# EAGLE board FTDI Basic-GiantPanel-v24-3.3V (EAGLE 6.4), part 1 of 8
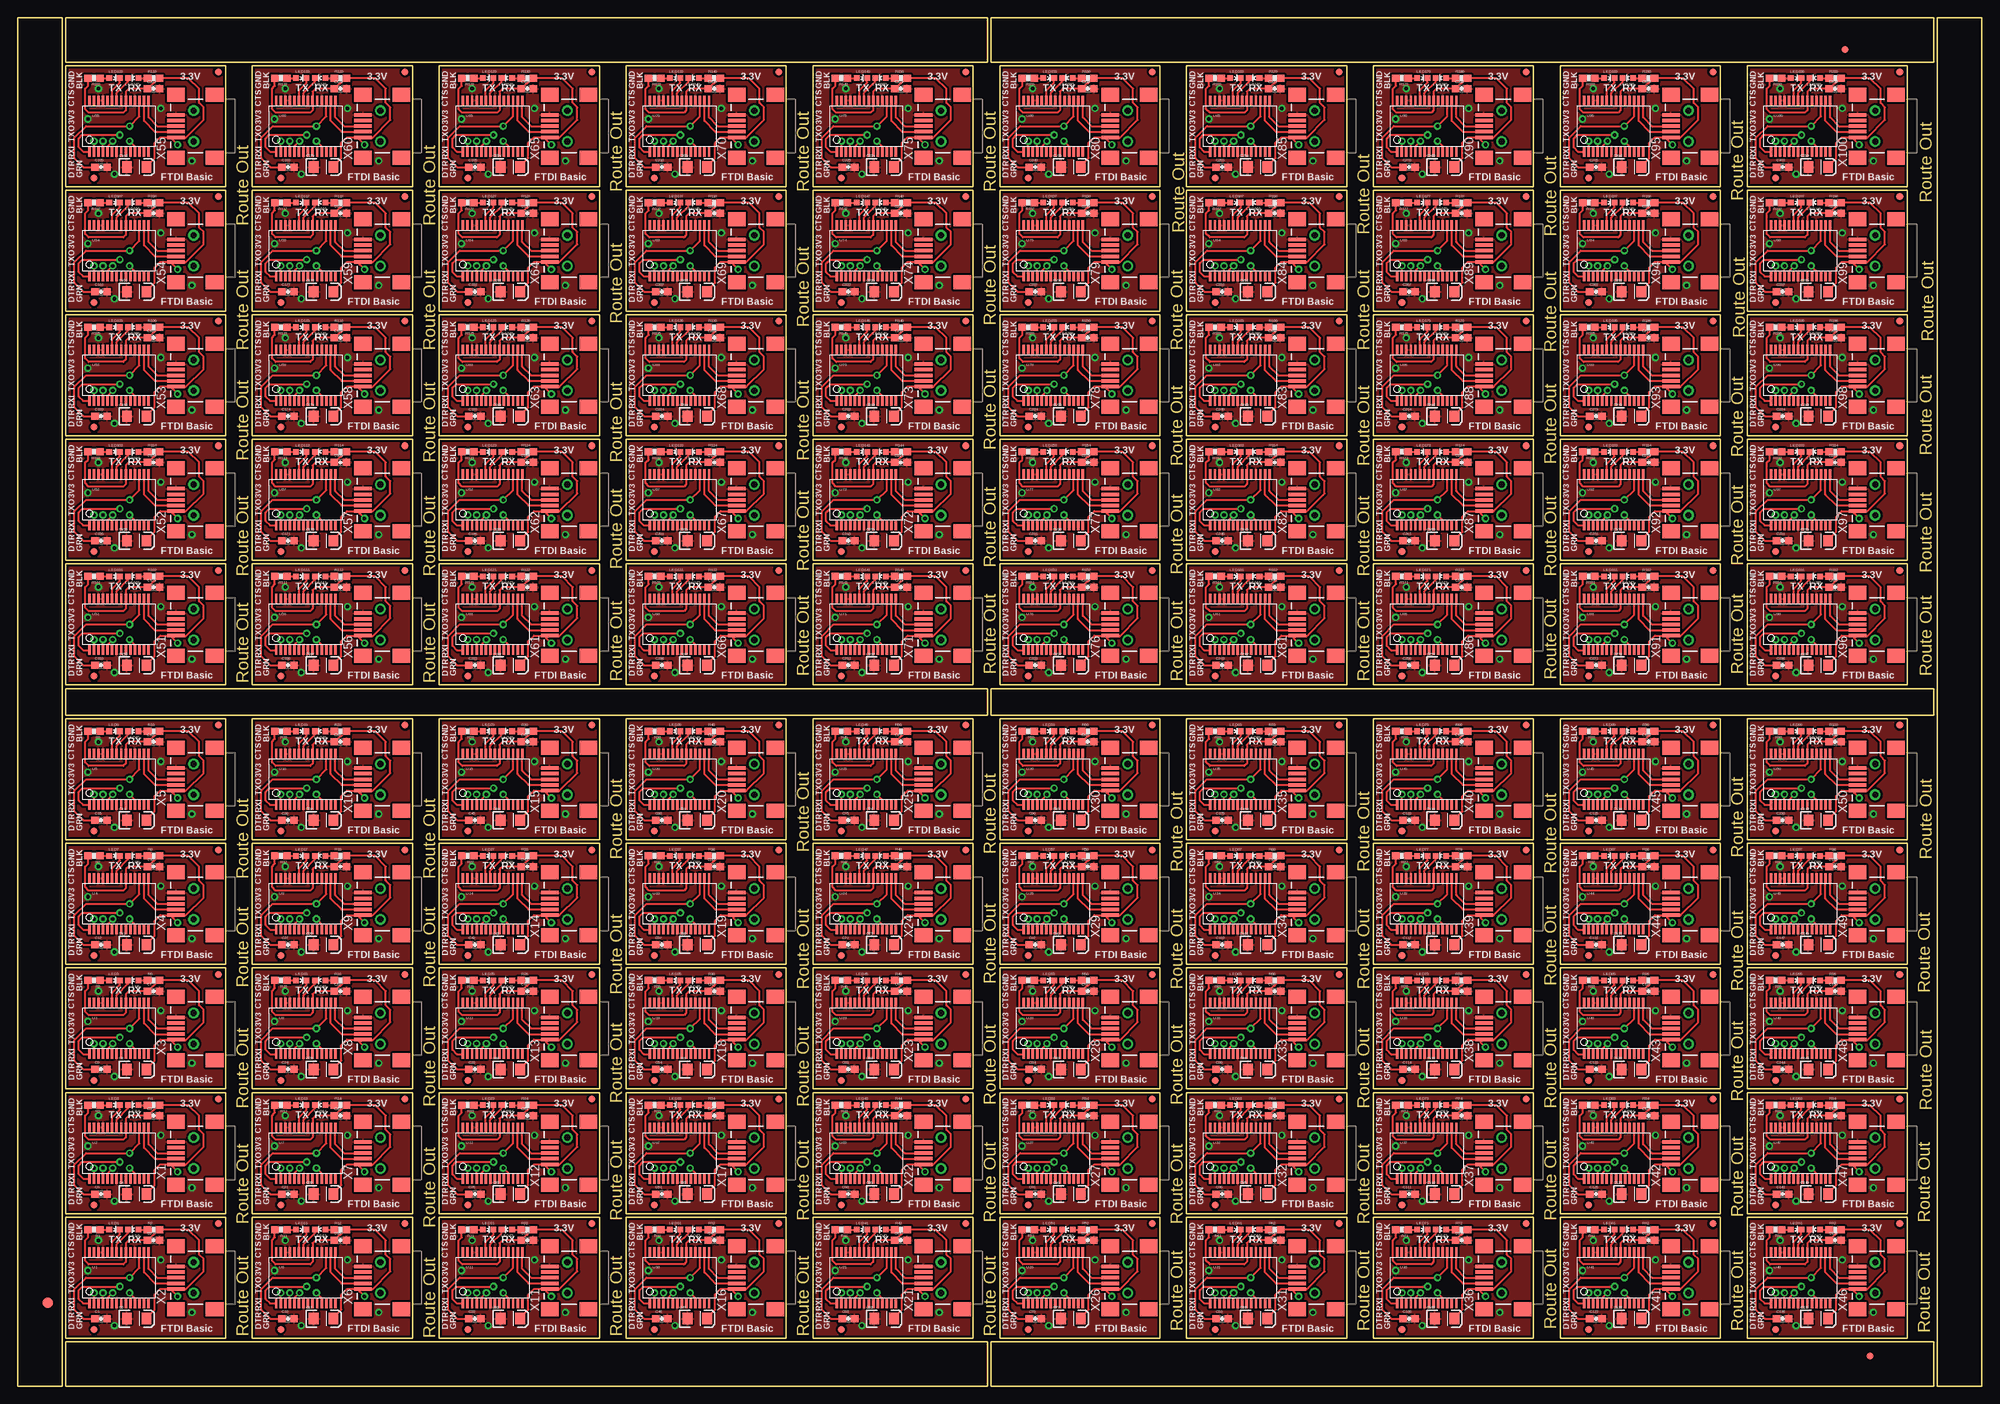
[diagram p0: board, top side]
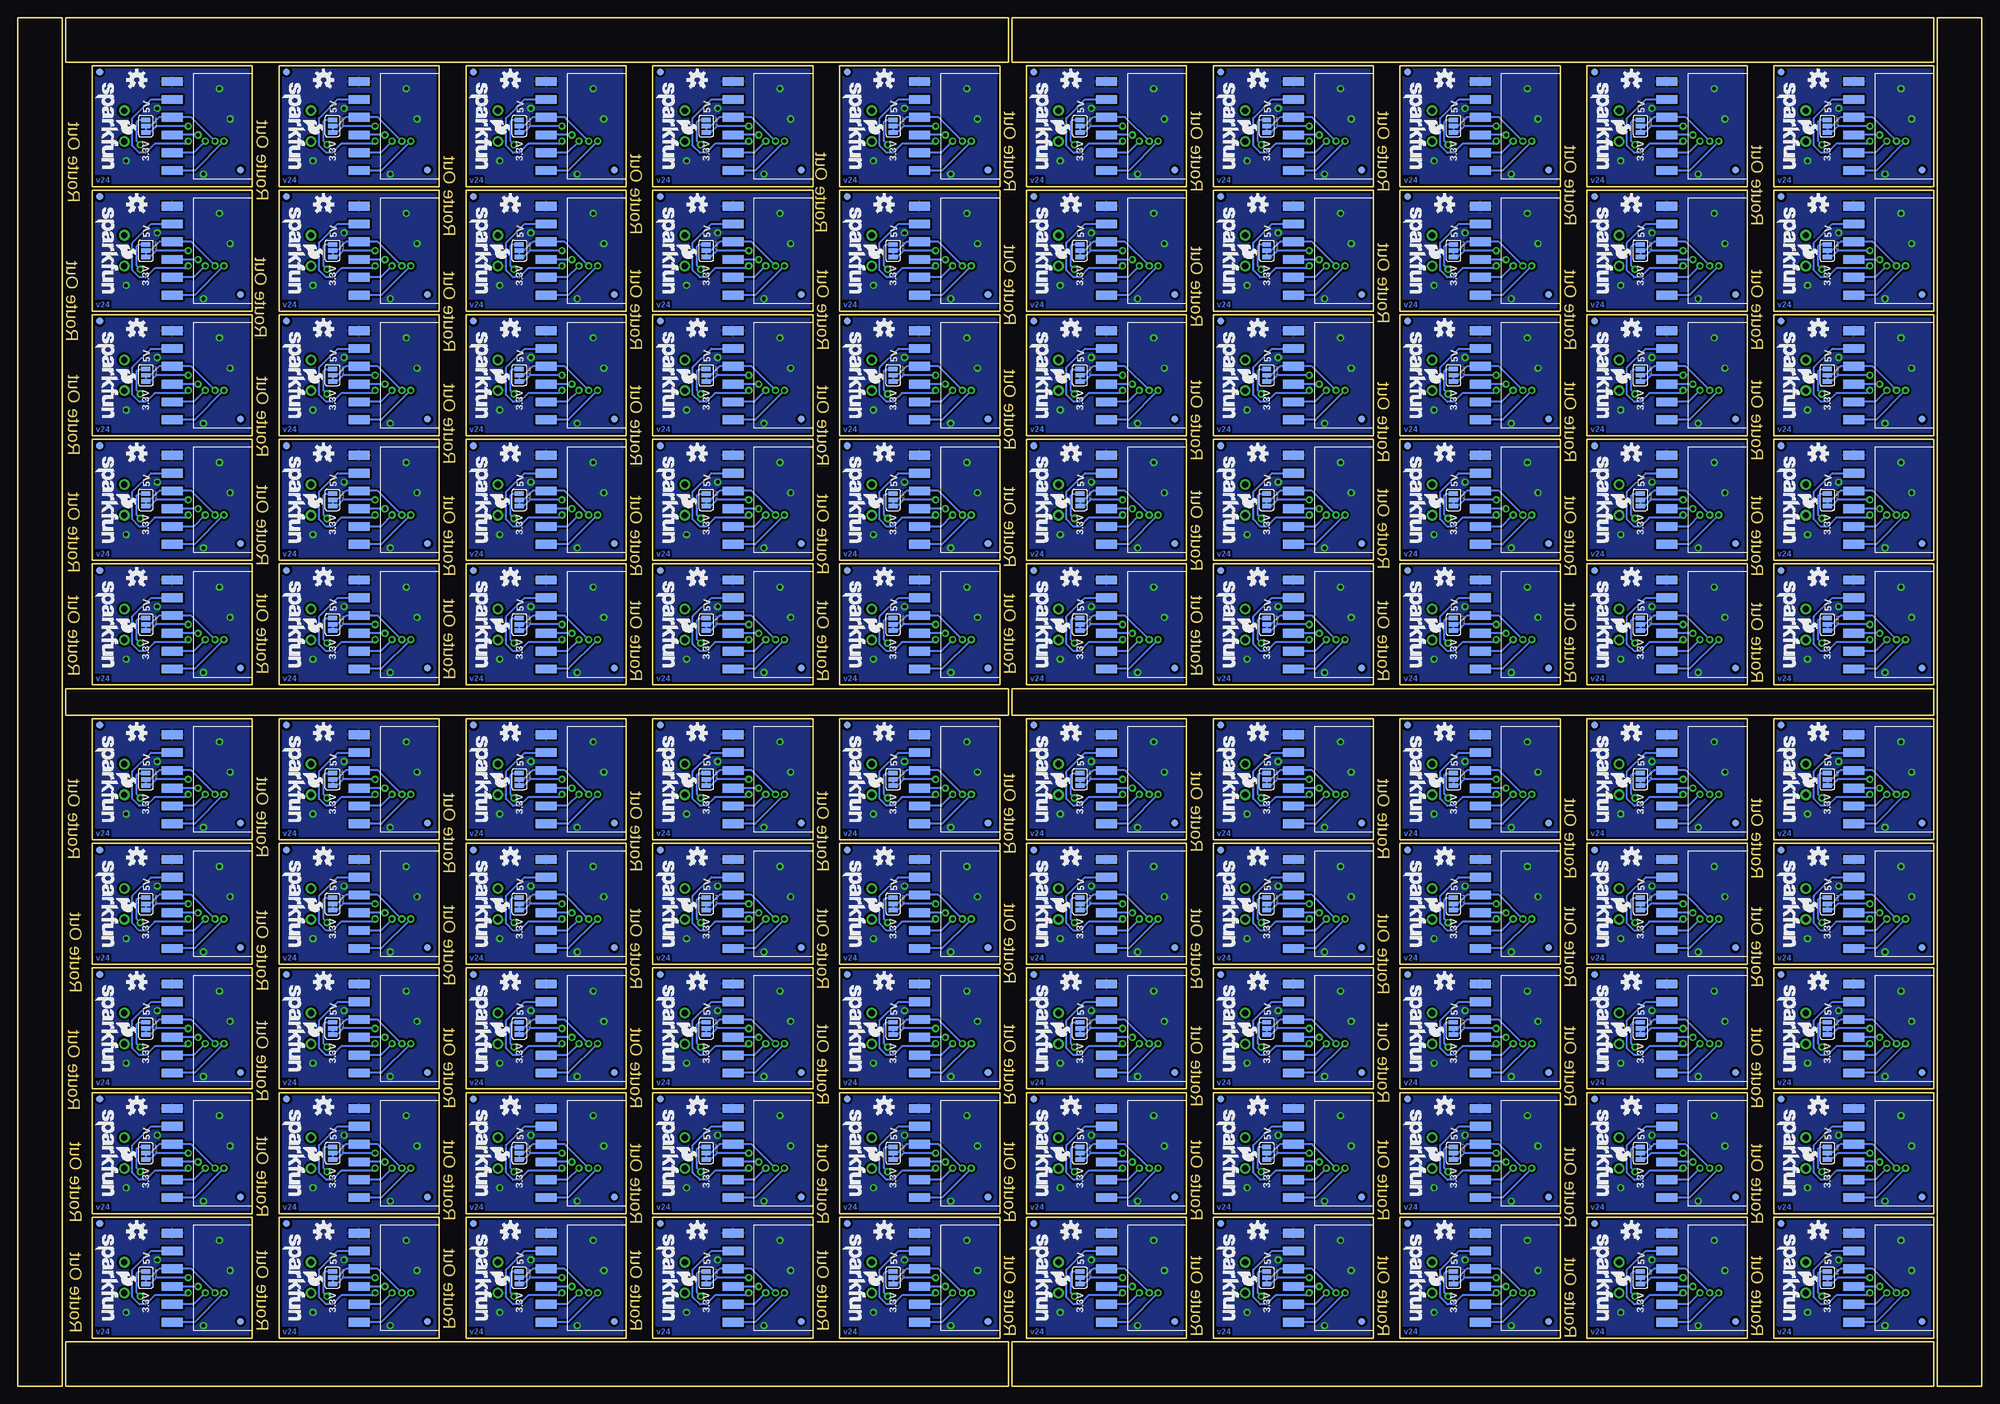
[diagram p1: board, bottom side, seen from below]

Size 280.42 x 195.33 mm. Coordinates in mm from the lower left corner, seen from the top.
Outline: 432 segments
Copper layers (1*16): Top 0.035mm / dielectric 1.5mm / Bottom 0.035mm
Design rules "SparkFun": minimum track width 8mil, minimum drill 20mil, track to track 8mil, track to pad 8mil, pad to pad 8mil, via to via 8mil, smd to smd 8mil, copper to edge 8mil, drill to drill 8mil, minimum pad ring 12mil, minimum via ring 10mil, stop-mask expansion 4mil, vias tented up to drill 20mil, thermal gap 10mil
Net classes: 0 default: width 0.203 mm; 1 power: width 0.254 mm

## Footprints (pad centres in the part's own frame; a part is rotated, then mirrored left to right if it is on the bottom)
0603-CAP = smd 1.1 x 1: 1 -0.85,0; 2 0.85,0
EIA3216 = smd 1.4 x 1.6: A 1.4,0; C -1.4,0
FIDUCIAL-1.5X3 = smd 1.5 x 1.5: 1 0,0
FIDUCIAL-1X2 = smd 1 x 1: 1 0,0
1X06-SMD-FEMALE-V2 = smd 1.25 x 3: 1 6.35,3.425; 2 3.81,3.425; 3 1.27,3.425; 4 -1.27,3.425; 5 -3.81,3.425; 6 -6.35,3.425
LED-0603 = smd 0.8 x 0.8: A 0,-0.75; C 0,0.75
0603-RES = smd 1.1 x 1: 1 -0.85,0; 2 0.85,0
SJ_3 = smd 0.635 x 1.27: 1 -0.889,0; 2 0,0; 3 0.889,0
SSOP28DB = smd 0.348 x 1.397: 1 -4.225,-3.656; 2 -3.575,-3.656; 3 -2.925,-3.656; 4 -2.275,-3.656; 5 -1.625,-3.656; 6 -0.975,-3.656; 7 -0.325,-3.656; 8 0.325,-3.656; 9 0.975,-3.656; 10 1.625,-3.656; 11 2.275,-3.656; 12 2.925,-3.656; 13 3.575,-3.656; 14 4.225,-3.656; 15 4.225,3.656; 16 3.575,3.656; 17 2.925,3.656; 18 2.275,3.656; 19 1.625,3.656; 20 0.975,3.656; 21 0.325,3.656; 22 -0.325,3.656; 23 -0.975,3.656; 24 -1.625,3.656; 25 -2.275,3.656; 26 -2.925,3.656; 27 -3.575,3.656; 28 -4.225,3.656
USB-MINIB-NOSTOP = smd 2.5 x 0.5: D+ 2.5,0; D- 2.5,0.8; GND 2.5,-1.6; ID 2.5,-0.8; VBUS 2.5,1.6 | smd 2.5 x 2: G1 -3,-4.5; G2 -3,4.5; G3 2.5,4.5; G4 2.5,-4.5 | drill 0.9 pad 0.8: H1 0,2.2 | drill 0.9 pad 0.787: H2 0,-2.2

## Placement (x,y rotation side)
C1  0.1uF  [0603-CAP]  11.94,9.65 0 top
C2  0.1uF  [0603-CAP]  19.43,20.83 0 top
C3  0.1uF  [0603-CAP]  19.43,38.61 0 top
C4  10uF  [EIA3216]  17.02,27.43 0 top
C5  10uF  [EIA3216]  17.02,9.65 0 top
C6  0.1uF  [0603-CAP]  11.94,27.43 0 top
C7  0.1uF  [0603-CAP]  19.43,56.39 0 top
C8  10uF  [EIA3216]  17.02,45.21 0 top
C9  0.1uF  [0603-CAP]  11.94,45.21 0 top
C10  0.1uF  [0603-CAP]  19.43,74.17 0 top
C11  10uF  [EIA3216]  17.02,62.99 0 top
C12  0.1uF  [0603-CAP]  11.94,62.99 0 top
C13  0.1uF  [0603-CAP]  19.43,91.95 0 top
C14  10uF  [EIA3216]  17.02,80.77 0 top
C15  0.1uF  [0603-CAP]  11.94,80.77 0 top
C16  0.1uF  [0603-CAP]  46.1,20.83 0 top
C17  10uF  [EIA3216]  43.69,9.65 0 top
C18  0.1uF  [0603-CAP]  38.61,9.65 0 top
C19  0.1uF  [0603-CAP]  46.1,38.61 0 top
C20  10uF  [EIA3216]  43.69,27.43 0 top
C21  0.1uF  [0603-CAP]  38.61,27.43 0 top
C22  0.1uF  [0603-CAP]  46.1,56.39 0 top
C23  10uF  [EIA3216]  43.69,45.21 0 top
C24  0.1uF  [0603-CAP]  38.61,45.21 0 top
C25  0.1uF  [0603-CAP]  46.1,74.17 0 top
C26  10uF  [EIA3216]  43.69,62.99 0 top
C27  0.1uF  [0603-CAP]  38.61,62.99 0 top
C28  0.1uF  [0603-CAP]  46.1,91.95 0 top
C29  10uF  [EIA3216]  43.69,80.77 0 top
C30  0.1uF  [0603-CAP]  38.61,80.77 0 top
C31  0.1uF  [0603-CAP]  72.77,20.83 0 top
C32  10uF  [EIA3216]  70.36,9.65 0 top
C33  0.1uF  [0603-CAP]  65.28,9.65 0 top
C34  0.1uF  [0603-CAP]  72.77,38.61 0 top
C35  10uF  [EIA3216]  70.36,27.43 0 top
C36  0.1uF  [0603-CAP]  65.28,27.43 0 top
C37  0.1uF  [0603-CAP]  72.77,56.39 0 top
C38  10uF  [EIA3216]  70.36,45.21 0 top
C39  0.1uF  [0603-CAP]  65.28,45.21 0 top
C40  0.1uF  [0603-CAP]  72.77,74.17 0 top
C41  10uF  [EIA3216]  70.36,62.99 0 top
C42  0.1uF  [0603-CAP]  65.28,62.99 0 top
C43  0.1uF  [0603-CAP]  72.77,91.95 0 top
C44  10uF  [EIA3216]  70.36,80.77 0 top
C45  0.1uF  [0603-CAP]  65.28,80.77 0 top
C46  0.1uF  [0603-CAP]  99.44,20.83 0 top
C47  10uF  [EIA3216]  97.03,9.65 0 top
C48  0.1uF  [0603-CAP]  91.95,9.65 0 top
C49  0.1uF  [0603-CAP]  99.44,38.61 0 top
C50  10uF  [EIA3216]  97.03,27.43 0 top
C51  0.1uF  [0603-CAP]  91.95,27.43 0 top
C52  0.1uF  [0603-CAP]  99.44,56.39 0 top
C53  10uF  [EIA3216]  97.03,45.21 0 top
C54  0.1uF  [0603-CAP]  91.95,45.21 0 top
C55  0.1uF  [0603-CAP]  99.44,74.17 0 top
C56  10uF  [EIA3216]  97.03,62.99 0 top
C57  0.1uF  [0603-CAP]  91.95,62.99 0 top
C58  0.1uF  [0603-CAP]  99.44,91.95 0 top
C59  10uF  [EIA3216]  97.03,80.77 0 top
C60  0.1uF  [0603-CAP]  91.95,80.77 0 top
C61  0.1uF  [0603-CAP]  126.11,20.83 0 top
C62  10uF  [EIA3216]  123.7,9.65 0 top
C63  0.1uF  [0603-CAP]  118.62,9.65 0 top
C64  0.1uF  [0603-CAP]  126.11,38.61 0 top
C65  10uF  [EIA3216]  123.7,27.43 0 top
C66  0.1uF  [0603-CAP]  118.62,27.43 0 top
C67  0.1uF  [0603-CAP]  126.11,56.39 0 top
C68  10uF  [EIA3216]  123.7,45.21 0 top
C69  0.1uF  [0603-CAP]  118.62,45.21 0 top
C70  0.1uF  [0603-CAP]  126.11,74.17 0 top
C71  10uF  [EIA3216]  123.7,62.99 0 top
C72  0.1uF  [0603-CAP]  118.62,62.99 0 top
C73  0.1uF  [0603-CAP]  126.11,91.95 0 top
C74  10uF  [EIA3216]  123.7,80.77 0 top
C75  0.1uF  [0603-CAP]  118.62,80.77 0 top
C76  0.1uF  [0603-CAP]  152.78,20.83 0 top
C77  10uF  [EIA3216]  150.37,9.65 0 top
C78  0.1uF  [0603-CAP]  145.29,9.65 0 top
C79  0.1uF  [0603-CAP]  152.78,38.61 0 top
C80  10uF  [EIA3216]  150.37,27.43 0 top
C81  0.1uF  [0603-CAP]  145.29,27.43 0 top
C82  0.1uF  [0603-CAP]  152.78,56.39 0 top
C83  10uF  [EIA3216]  150.37,45.21 0 top
C84  0.1uF  [0603-CAP]  145.29,45.21 0 top
C85  0.1uF  [0603-CAP]  152.78,74.17 0 top
C86  10uF  [EIA3216]  150.37,62.99 0 top
C87  0.1uF  [0603-CAP]  145.29,62.99 0 top
C88  0.1uF  [0603-CAP]  152.78,91.95 0 top
C89  10uF  [EIA3216]  150.37,80.77 0 top
C90  0.1uF  [0603-CAP]  145.29,80.77 0 top
C91  0.1uF  [0603-CAP]  179.45,20.83 0 top
C92  10uF  [EIA3216]  177.04,9.65 0 top
C93  0.1uF  [0603-CAP]  171.96,9.65 0 top
C94  0.1uF  [0603-CAP]  179.45,38.61 0 top
C95  10uF  [EIA3216]  177.04,27.43 0 top
C96  0.1uF  [0603-CAP]  171.96,27.43 0 top
C97  0.1uF  [0603-CAP]  179.45,56.39 0 top
C98  10uF  [EIA3216]  177.04,45.21 0 top
C99  0.1uF  [0603-CAP]  171.96,45.21 0 top
C100  0.1uF  [0603-CAP]  179.45,74.17 0 top
C101  10uF  [EIA3216]  177.04,62.99 0 top
C102  0.1uF  [0603-CAP]  171.96,62.99 0 top
C103  0.1uF  [0603-CAP]  179.45,91.95 0 top
C104  10uF  [EIA3216]  177.04,80.77 0 top
C105  0.1uF  [0603-CAP]  171.96,80.77 0 top
C106  0.1uF  [0603-CAP]  206.12,20.83 0 top
C107  10uF  [EIA3216]  203.71,9.65 0 top
C108  0.1uF  [0603-CAP]  198.63,9.65 0 top
C109  0.1uF  [0603-CAP]  206.12,38.61 0 top
C110  10uF  [EIA3216]  203.71,27.43 0 top
C111  0.1uF  [0603-CAP]  198.63,27.43 0 top
C112  0.1uF  [0603-CAP]  206.12,56.39 0 top
C113  10uF  [EIA3216]  203.71,45.21 0 top
C114  0.1uF  [0603-CAP]  198.63,45.21 0 top
C115  0.1uF  [0603-CAP]  206.12,74.17 0 top
C116  10uF  [EIA3216]  203.71,62.99 0 top
C117  0.1uF  [0603-CAP]  198.63,62.99 0 top
C118  0.1uF  [0603-CAP]  206.12,91.95 0 top
C119  10uF  [EIA3216]  203.71,80.77 0 top
C120  0.1uF  [0603-CAP]  198.63,80.77 0 top
C121  0.1uF  [0603-CAP]  232.79,20.83 0 top
C122  10uF  [EIA3216]  230.38,9.65 0 top
C123  0.1uF  [0603-CAP]  225.3,9.65 0 top
C124  0.1uF  [0603-CAP]  232.79,38.61 0 top
C125  10uF  [EIA3216]  230.38,27.43 0 top
C126  0.1uF  [0603-CAP]  225.3,27.43 0 top
C127  0.1uF  [0603-CAP]  232.79,56.39 0 top
C128  10uF  [EIA3216]  230.38,45.21 0 top
C129  0.1uF  [0603-CAP]  225.3,45.21 0 top
C130  0.1uF  [0603-CAP]  232.79,74.17 0 top
C131  10uF  [EIA3216]  230.38,62.99 0 top
C132  0.1uF  [0603-CAP]  225.3,62.99 0 top
C133  0.1uF  [0603-CAP]  232.79,91.95 0 top
C134  10uF  [EIA3216]  230.38,80.77 0 top
C135  0.1uF  [0603-CAP]  225.3,80.77 0 top
C136  0.1uF  [0603-CAP]  259.46,20.83 0 top
C137  10uF  [EIA3216]  257.05,9.65 0 top
C138  0.1uF  [0603-CAP]  251.97,9.65 0 top
C139  0.1uF  [0603-CAP]  259.46,38.61 0 top
C140  10uF  [EIA3216]  257.05,27.43 0 top
C141  0.1uF  [0603-CAP]  251.97,27.43 0 top
C142  0.1uF  [0603-CAP]  259.46,56.39 0 top
C143  10uF  [EIA3216]  257.05,45.21 0 top
C144  0.1uF  [0603-CAP]  251.97,45.21 0 top
C145  0.1uF  [0603-CAP]  259.46,74.17 0 top
C146  10uF  [EIA3216]  257.05,62.99 0 top
C147  0.1uF  [0603-CAP]  251.97,62.99 0 top
C148  0.1uF  [0603-CAP]  259.46,91.95 0 top
C149  10uF  [EIA3216]  257.05,80.77 0 top
C150  0.1uF  [0603-CAP]  251.97,80.77 0 top
C151  0.1uF  [0603-CAP]  19.43,114.05 0 top
C152  10uF  [EIA3216]  17.02,102.87 0 top
C153  0.1uF  [0603-CAP]  11.94,102.87 0 top
C154  0.1uF  [0603-CAP]  19.43,131.83 0 top
C155  10uF  [EIA3216]  17.02,120.65 0 top
C156  0.1uF  [0603-CAP]  11.94,120.65 0 top
C157  0.1uF  [0603-CAP]  19.43,149.61 0 top
C158  10uF  [EIA3216]  17.02,138.43 0 top
C159  0.1uF  [0603-CAP]  11.94,138.43 0 top
C160  0.1uF  [0603-CAP]  19.43,167.39 0 top
C161  10uF  [EIA3216]  17.02,156.21 0 top
C162  0.1uF  [0603-CAP]  11.94,156.21 0 top
C163  0.1uF  [0603-CAP]  19.43,185.17 0 top
C164  10uF  [EIA3216]  17.02,173.99 0 top
C165  0.1uF  [0603-CAP]  11.94,173.99 0 top
C166  0.1uF  [0603-CAP]  46.1,114.05 0 top
C167  10uF  [EIA3216]  43.69,102.87 0 top
C168  0.1uF  [0603-CAP]  38.61,102.87 0 top
C169  0.1uF  [0603-CAP]  46.1,131.83 0 top
C170  10uF  [EIA3216]  43.69,120.65 0 top
C171  0.1uF  [0603-CAP]  38.61,120.65 0 top
C172  0.1uF  [0603-CAP]  46.1,149.61 0 top
C173  10uF  [EIA3216]  43.69,138.43 0 top
C174  0.1uF  [0603-CAP]  38.61,138.43 0 top
C175  0.1uF  [0603-CAP]  46.1,167.39 0 top
C176  10uF  [EIA3216]  43.69,156.21 0 top
C177  0.1uF  [0603-CAP]  38.61,156.21 0 top
C178  0.1uF  [0603-CAP]  46.1,185.17 0 top
C179  10uF  [EIA3216]  43.69,173.99 0 top
C180  0.1uF  [0603-CAP]  38.61,173.99 0 top
C181  0.1uF  [0603-CAP]  72.77,114.05 0 top
C182  10uF  [EIA3216]  70.36,102.87 0 top
C183  0.1uF  [0603-CAP]  65.28,102.87 0 top
C184  0.1uF  [0603-CAP]  72.77,131.83 0 top
C185  10uF  [EIA3216]  70.36,120.65 0 top
C186  0.1uF  [0603-CAP]  65.28,120.65 0 top
C187  0.1uF  [0603-CAP]  72.77,149.61 0 top
C188  10uF  [EIA3216]  70.36,138.43 0 top
C189  0.1uF  [0603-CAP]  65.28,138.43 0 top
C190  0.1uF  [0603-CAP]  72.77,167.39 0 top
C191  10uF  [EIA3216]  70.36,156.21 0 top
C192  0.1uF  [0603-CAP]  65.28,156.21 0 top
C193  0.1uF  [0603-CAP]  72.77,185.17 0 top
C194  10uF  [EIA3216]  70.36,173.99 0 top
C195  0.1uF  [0603-CAP]  65.28,173.99 0 top
C196  0.1uF  [0603-CAP]  99.44,114.05 0 top
C197  10uF  [EIA3216]  97.03,102.87 0 top
C198  0.1uF  [0603-CAP]  91.95,102.87 0 top
C199  0.1uF  [0603-CAP]  99.44,131.83 0 top
C200  10uF  [EIA3216]  97.03,120.65 0 top
C201  0.1uF  [0603-CAP]  91.95,120.65 0 top
C202  0.1uF  [0603-CAP]  99.44,149.61 0 top
C203  10uF  [EIA3216]  97.03,138.43 0 top
C204  0.1uF  [0603-CAP]  91.95,138.43 0 top
C205  0.1uF  [0603-CAP]  99.44,167.39 0 top
C206  10uF  [EIA3216]  97.03,156.21 0 top
C207  0.1uF  [0603-CAP]  91.95,156.21 0 top
C208  0.1uF  [0603-CAP]  99.44,185.17 0 top
C209  10uF  [EIA3216]  97.03,173.99 0 top
C210  0.1uF  [0603-CAP]  91.95,173.99 0 top
C211  0.1uF  [0603-CAP]  126.11,114.05 0 top
C212  10uF  [EIA3216]  123.7,102.87 0 top
C213  0.1uF  [0603-CAP]  118.62,102.87 0 top
C214  0.1uF  [0603-CAP]  126.11,131.83 0 top
C215  10uF  [EIA3216]  123.7,120.65 0 top
C216  0.1uF  [0603-CAP]  118.62,120.65 0 top
C217  0.1uF  [0603-CAP]  126.11,149.61 0 top
C218  10uF  [EIA3216]  123.7,138.43 0 top
C219  0.1uF  [0603-CAP]  118.62,138.43 0 top
C220  0.1uF  [0603-CAP]  126.11,167.39 0 top
C221  10uF  [EIA3216]  123.7,156.21 0 top
C222  0.1uF  [0603-CAP]  118.62,156.21 0 top
C223  0.1uF  [0603-CAP]  126.11,185.17 0 top
C224  10uF  [EIA3216]  123.7,173.99 0 top
C225  0.1uF  [0603-CAP]  118.62,173.99 0 top
C226  0.1uF  [0603-CAP]  152.78,114.05 0 top
C227  10uF  [EIA3216]  150.37,102.87 0 top
C228  0.1uF  [0603-CAP]  145.29,102.87 0 top
C229  0.1uF  [0603-CAP]  152.78,131.83 0 top
C230  10uF  [EIA3216]  150.37,120.65 0 top
C231  0.1uF  [0603-CAP]  145.29,120.65 0 top
C232  0.1uF  [0603-CAP]  152.78,149.61 0 top
C233  10uF  [EIA3216]  150.37,138.43 0 top
C234  0.1uF  [0603-CAP]  145.29,138.43 0 top
C235  0.1uF  [0603-CAP]  152.78,167.39 0 top
C236  10uF  [EIA3216]  150.37,156.21 0 top
C237  0.1uF  [0603-CAP]  145.29,156.21 0 top
C238  0.1uF  [0603-CAP]  152.78,185.17 0 top
C239  10uF  [EIA3216]  150.37,173.99 0 top
C240  0.1uF  [0603-CAP]  145.29,173.99 0 top
C241  0.1uF  [0603-CAP]  179.45,114.05 0 top
C242  10uF  [EIA3216]  177.04,102.87 0 top
C243  0.1uF  [0603-CAP]  171.96,102.87 0 top
C244  0.1uF  [0603-CAP]  179.45,131.83 0 top
C245  10uF  [EIA3216]  177.04,120.65 0 top
C246  0.1uF  [0603-CAP]  171.96,120.65 0 top
C247  0.1uF  [0603-CAP]  179.45,149.61 0 top
C248  10uF  [EIA3216]  177.04,138.43 0 top
C249  0.1uF  [0603-CAP]  171.96,138.43 0 top
C250  0.1uF  [0603-CAP]  179.45,167.39 0 top
C251  10uF  [EIA3216]  177.04,156.21 0 top
C252  0.1uF  [0603-CAP]  171.96,156.21 0 top
C253  0.1uF  [0603-CAP]  179.45,185.17 0 top
C254  10uF  [EIA3216]  177.04,173.99 0 top
C255  0.1uF  [0603-CAP]  171.96,173.99 0 top
C256  0.1uF  [0603-CAP]  206.12,114.05 0 top
C257  10uF  [EIA3216]  203.71,102.87 0 top
C258  0.1uF  [0603-CAP]  198.63,102.87 0 top
C259  0.1uF  [0603-CAP]  206.12,131.83 0 top
C260  10uF  [EIA3216]  203.71,120.65 0 top
C261  0.1uF  [0603-CAP]  198.63,120.65 0 top
C262  0.1uF  [0603-CAP]  206.12,149.61 0 top
C263  10uF  [EIA3216]  203.71,138.43 0 top
C264  0.1uF  [0603-CAP]  198.63,138.43 0 top
C265  0.1uF  [0603-CAP]  206.12,167.39 0 top
C266  10uF  [EIA3216]  203.71,156.21 0 top
C267  0.1uF  [0603-CAP]  198.63,156.21 0 top
C268  0.1uF  [0603-CAP]  206.12,185.17 0 top
C269  10uF  [EIA3216]  203.71,173.99 0 top
C270  0.1uF  [0603-CAP]  198.63,173.99 0 top
C271  0.1uF  [0603-CAP]  232.79,114.05 0 top
C272  10uF  [EIA3216]  230.38,102.87 0 top
C273  0.1uF  [0603-CAP]  225.3,102.87 0 top
C274  0.1uF  [0603-CAP]  232.79,131.83 0 top
C275  10uF  [EIA3216]  230.38,120.65 0 top
C276  0.1uF  [0603-CAP]  225.3,120.65 0 top
C277  0.1uF  [0603-CAP]  232.79,149.61 0 top
C278  10uF  [EIA3216]  230.38,138.43 0 top
C279  0.1uF  [0603-CAP]  225.3,138.43 0 top
C280  0.1uF  [0603-CAP]  232.79,167.39 0 top
C281  10uF  [EIA3216]  230.38,156.21 0 top
C282  0.1uF  [0603-CAP]  225.3,156.21 0 top
C283  0.1uF  [0603-CAP]  232.79,185.17 0 top
C284  10uF  [EIA3216]  230.38,173.99 0 top
C285  0.1uF  [0603-CAP]  225.3,173.99 0 top
C286  0.1uF  [0603-CAP]  259.46,114.05 0 top
C287  10uF  [EIA3216]  257.05,102.87 0 top
C288  0.1uF  [0603-CAP]  251.97,102.87 0 top
C289  0.1uF  [0603-CAP]  259.46,131.83 0 top
C290  10uF  [EIA3216]  257.05,120.65 0 top
C291  0.1uF  [0603-CAP]  251.97,120.65 0 top
C292  0.1uF  [0603-CAP]  259.46,149.61 0 top
C293  10uF  [EIA3216]  257.05,138.43 0 top
C294  0.1uF  [0603-CAP]  251.97,138.43 0 top
C295  0.1uF  [0603-CAP]  259.46,167.39 0 top
C296  10uF  [EIA3216]  257.05,156.21 0 top
C297  0.1uF  [0603-CAP]  251.97,156.21 0 top
C298  0.1uF  [0603-CAP]  259.46,185.17 0 top
C299  10uF  [EIA3216]  257.05,173.99 0 top
C300  0.1uF  [0603-CAP]  251.97,173.99 0 top
E$1  [FIDUCIAL-1.5X3]  4.32,11.94 0 top
E$5  [FIDUCIAL-1X2]  264.41,4.32 90 top
E$7  [FIDUCIAL-1X2]  260.86,190.75 90 top
JP1  [1X06-SMD-FEMALE-V2]  14.86,15.49 90 bottom
JP2  LOGO-SFESK  [SFE-LOGO-FLAME]  26.29,16.26 270 bottom
JP3  FIDUCIAL1X2  [FIDUCIAL-1X2]  10.92,8.1 0 top
JP4  FIDUCIAL1X2  [FIDUCIAL-1X2]  28.65,23.22 0 top
JP5  FIDUCIAL1X2  [FIDUCIAL-1X2]  8.53,9.25 0 bottom
JP6  FIDUCIAL1X2  [FIDUCIAL-1X2]  28.65,23.22 0 bottom
JP7  LOGO-SFESK  [SFE-LOGO-FLAME]  26.29,34.04 270 bottom
JP8  [1X06-SMD-FEMALE-V2]  14.86,33.27 90 bottom
JP9  FIDUCIAL1X2  [FIDUCIAL-1X2]  10.92,25.88 0 top
JP10  FIDUCIAL1X2  [FIDUCIAL-1X2]  28.65,41 0 top
JP11  FIDUCIAL1X2  [FIDUCIAL-1X2]  8.53,27.03 0 bottom
JP12  FIDUCIAL1X2  [FIDUCIAL-1X2]  28.65,41 0 bottom
JP13  LOGO-SFESK  [SFE-LOGO-FLAME]  26.29,51.82 270 bottom
JP14  [1X06-SMD-FEMALE-V2]  14.86,51.05 90 bottom
JP15  FIDUCIAL1X2  [FIDUCIAL-1X2]  10.92,43.66 0 top
JP16  FIDUCIAL1X2  [FIDUCIAL-1X2]  28.65,58.78 0 top
JP17  FIDUCIAL1X2  [FIDUCIAL-1X2]  8.53,44.81 0 bottom
JP18  FIDUCIAL1X2  [FIDUCIAL-1X2]  28.65,58.78 0 bottom
JP19  LOGO-SFESK  [SFE-LOGO-FLAME]  26.29,69.6 270 bottom
JP20  [1X06-SMD-FEMALE-V2]  14.86,68.83 90 bottom
JP21  FIDUCIAL1X2  [FIDUCIAL-1X2]  10.92,61.44 0 top
JP22  FIDUCIAL1X2  [FIDUCIAL-1X2]  28.65,76.56 0 top
JP23  FIDUCIAL1X2  [FIDUCIAL-1X2]  8.53,62.59 0 bottom
JP24  FIDUCIAL1X2  [FIDUCIAL-1X2]  28.65,76.56 0 bottom
JP25  LOGO-SFESK  [SFE-LOGO-FLAME]  26.29,87.38 270 bottom
JP26  [1X06-SMD-FEMALE-V2]  14.86,86.61 90 bottom
JP27  FIDUCIAL1X2  [FIDUCIAL-1X2]  10.92,79.22 0 top
JP28  FIDUCIAL1X2  [FIDUCIAL-1X2]  28.65,94.34 0 top
JP29  FIDUCIAL1X2  [FIDUCIAL-1X2]  8.53,80.37 0 bottom
JP30  FIDUCIAL1X2  [FIDUCIAL-1X2]  28.65,94.34 0 bottom
JP31  LOGO-SFESK  [SFE-LOGO-FLAME]  52.96,16.26 270 bottom
JP32  [1X06-SMD-FEMALE-V2]  41.53,15.49 90 bottom
JP33  FIDUCIAL1X2  [FIDUCIAL-1X2]  37.59,8.1 0 top
JP34  FIDUCIAL1X2  [FIDUCIAL-1X2]  55.32,23.22 0 top
JP35  FIDUCIAL1X2  [FIDUCIAL-1X2]  35.2,9.25 0 bottom
JP36  FIDUCIAL1X2  [FIDUCIAL-1X2]  55.32,23.22 0 bottom
JP37  LOGO-SFESK  [SFE-LOGO-FLAME]  52.96,34.04 270 bottom
JP38  [1X06-SMD-FEMALE-V2]  41.53,33.27 90 bottom
JP39  FIDUCIAL1X2  [FIDUCIAL-1X2]  37.59,25.88 0 top
JP40  FIDUCIAL1X2  [FIDUCIAL-1X2]  55.32,41 0 top
JP41  FIDUCIAL1X2  [FIDUCIAL-1X2]  35.2,27.03 0 bottom
JP42  FIDUCIAL1X2  [FIDUCIAL-1X2]  55.32,41 0 bottom
JP43  LOGO-SFESK  [SFE-LOGO-FLAME]  52.96,51.82 270 bottom
JP44  [1X06-SMD-FEMALE-V2]  41.53,51.05 90 bottom
JP45  FIDUCIAL1X2  [FIDUCIAL-1X2]  37.59,43.66 0 top
JP46  FIDUCIAL1X2  [FIDUCIAL-1X2]  55.32,58.78 0 top
JP47  FIDUCIAL1X2  [FIDUCIAL-1X2]  35.2,44.81 0 bottom
JP48  FIDUCIAL1X2  [FIDUCIAL-1X2]  55.32,58.78 0 bottom
JP49  LOGO-SFESK  [SFE-LOGO-FLAME]  52.96,69.6 270 bottom
JP50  [1X06-SMD-FEMALE-V2]  41.53,68.83 90 bottom
JP51  FIDUCIAL1X2  [FIDUCIAL-1X2]  37.59,61.44 0 top
JP52  FIDUCIAL1X2  [FIDUCIAL-1X2]  55.32,76.56 0 top
JP53  FIDUCIAL1X2  [FIDUCIAL-1X2]  35.2,62.59 0 bottom
JP54  FIDUCIAL1X2  [FIDUCIAL-1X2]  55.32,76.56 0 bottom
JP55  LOGO-SFESK  [SFE-LOGO-FLAME]  52.96,87.38 270 bottom
JP56  [1X06-SMD-FEMALE-V2]  41.53,86.61 90 bottom
JP57  FIDUCIAL1X2  [FIDUCIAL-1X2]  37.59,79.22 0 top
JP58  FIDUCIAL1X2  [FIDUCIAL-1X2]  55.32,94.34 0 top
JP59  FIDUCIAL1X2  [FIDUCIAL-1X2]  35.2,80.37 0 bottom
JP60  FIDUCIAL1X2  [FIDUCIAL-1X2]  55.32,94.34 0 bottom
JP61  LOGO-SFESK  [SFE-LOGO-FLAME]  79.63,16.26 270 bottom
JP62  [1X06-SMD-FEMALE-V2]  68.2,15.49 90 bottom
JP63  FIDUCIAL1X2  [FIDUCIAL-1X2]  64.26,8.1 0 top
JP64  FIDUCIAL1X2  [FIDUCIAL-1X2]  81.99,23.22 0 top
JP65  FIDUCIAL1X2  [FIDUCIAL-1X2]  61.87,9.25 0 bottom
JP66  FIDUCIAL1X2  [FIDUCIAL-1X2]  81.99,23.22 0 bottom
JP67  LOGO-SFESK  [SFE-LOGO-FLAME]  79.63,34.04 270 bottom
JP68  [1X06-SMD-FEMALE-V2]  68.2,33.27 90 bottom
JP69  FIDUCIAL1X2  [FIDUCIAL-1X2]  64.26,25.88 0 top
JP70  FIDUCIAL1X2  [FIDUCIAL-1X2]  81.99,41 0 top
JP71  FIDUCIAL1X2  [FIDUCIAL-1X2]  61.87,27.03 0 bottom
JP72  FIDUCIAL1X2  [FIDUCIAL-1X2]  81.99,41 0 bottom
JP73  LOGO-SFESK  [SFE-LOGO-FLAME]  79.63,51.82 270 bottom
JP74  [1X06-SMD-FEMALE-V2]  68.2,51.05 90 bottom
JP75  FIDUCIAL1X2  [FIDUCIAL-1X2]  64.26,43.66 0 top
JP76  FIDUCIAL1X2  [FIDUCIAL-1X2]  81.99,58.78 0 top
JP77  FIDUCIAL1X2  [FIDUCIAL-1X2]  61.87,44.81 0 bottom
JP78  FIDUCIAL1X2  [FIDUCIAL-1X2]  81.99,58.78 0 bottom
JP79  LOGO-SFESK  [SFE-LOGO-FLAME]  79.63,69.6 270 bottom
JP80  [1X06-SMD-FEMALE-V2]  68.2,68.83 90 bottom
JP81  FIDUCIAL1X2  [FIDUCIAL-1X2]  64.26,61.44 0 top
JP82  FIDUCIAL1X2  [FIDUCIAL-1X2]  81.99,76.56 0 top
JP83  FIDUCIAL1X2  [FIDUCIAL-1X2]  61.87,62.59 0 bottom
JP84  FIDUCIAL1X2  [FIDUCIAL-1X2]  81.99,76.56 0 bottom
JP85  LOGO-SFESK  [SFE-LOGO-FLAME]  79.63,87.38 270 bottom
JP86  [1X06-SMD-FEMALE-V2]  68.2,86.61 90 bottom
JP87  FIDUCIAL1X2  [FIDUCIAL-1X2]  64.26,79.22 0 top
JP88  FIDUCIAL1X2  [FIDUCIAL-1X2]  81.99,94.34 0 top
JP89  FIDUCIAL1X2  [FIDUCIAL-1X2]  61.87,80.37 0 bottom
JP90  FIDUCIAL1X2  [FIDUCIAL-1X2]  81.99,94.34 0 bottom
JP91  LOGO-SFESK  [SFE-LOGO-FLAME]  106.3,16.26 270 bottom
JP92  [1X06-SMD-FEMALE-V2]  94.87,15.49 90 bottom
JP93  FIDUCIAL1X2  [FIDUCIAL-1X2]  90.93,8.1 0 top
JP94  FIDUCIAL1X2  [FIDUCIAL-1X2]  108.66,23.22 0 top
JP95  FIDUCIAL1X2  [FIDUCIAL-1X2]  88.54,9.25 0 bottom
JP96  FIDUCIAL1X2  [FIDUCIAL-1X2]  108.66,23.22 0 bottom
JP97  LOGO-SFESK  [SFE-LOGO-FLAME]  106.3,34.04 270 bottom
JP98  [1X06-SMD-FEMALE-V2]  94.87,33.27 90 bottom
JP99  FIDUCIAL1X2  [FIDUCIAL-1X2]  90.93,25.88 0 top
JP100  FIDUCIAL1X2  [FIDUCIAL-1X2]  108.66,41 0 top
JP101  FIDUCIAL1X2  [FIDUCIAL-1X2]  88.54,27.03 0 bottom
JP102  FIDUCIAL1X2  [FIDUCIAL-1X2]  108.66,41 0 bottom
JP103  LOGO-SFESK  [SFE-LOGO-FLAME]  106.3,51.82 270 bottom
JP104  [1X06-SMD-FEMALE-V2]  94.87,51.05 90 bottom
JP105  FIDUCIAL1X2  [FIDUCIAL-1X2]  90.93,43.66 0 top
JP106  FIDUCIAL1X2  [FIDUCIAL-1X2]  108.66,58.78 0 top
JP107  FIDUCIAL1X2  [FIDUCIAL-1X2]  88.54,44.81 0 bottom
JP108  FIDUCIAL1X2  [FIDUCIAL-1X2]  108.66,58.78 0 bottom
JP109  LOGO-SFESK  [SFE-LOGO-FLAME]  106.3,69.6 270 bottom
JP110  [1X06-SMD-FEMALE-V2]  94.87,68.83 90 bottom
JP111  FIDUCIAL1X2  [FIDUCIAL-1X2]  90.93,61.44 0 top
JP112  FIDUCIAL1X2  [FIDUCIAL-1X2]  108.66,76.56 0 top
JP113  FIDUCIAL1X2  [FIDUCIAL-1X2]  88.54,62.59 0 bottom
JP114  FIDUCIAL1X2  [FIDUCIAL-1X2]  108.66,76.56 0 bottom
JP115  LOGO-SFESK  [SFE-LOGO-FLAME]  106.3,87.38 270 bottom
JP116  [1X06-SMD-FEMALE-V2]  94.87,86.61 90 bottom
JP117  FIDUCIAL1X2  [FIDUCIAL-1X2]  90.93,79.22 0 top
JP118  FIDUCIAL1X2  [FIDUCIAL-1X2]  108.66,94.34 0 top
JP119  FIDUCIAL1X2  [FIDUCIAL-1X2]  88.54,80.37 0 bottom
JP120  FIDUCIAL1X2  [FIDUCIAL-1X2]  108.66,94.34 0 bottom
JP121  LOGO-SFESK  [SFE-LOGO-FLAME]  132.97,16.26 270 bottom
JP122  [1X06-SMD-FEMALE-V2]  121.54,15.49 90 bottom
JP123  FIDUCIAL1X2  [FIDUCIAL-1X2]  117.6,8.1 0 top
JP124  FIDUCIAL1X2  [FIDUCIAL-1X2]  135.33,23.22 0 top
JP125  FIDUCIAL1X2  [FIDUCIAL-1X2]  115.21,9.25 0 bottom
JP126  FIDUCIAL1X2  [FIDUCIAL-1X2]  135.33,23.22 0 bottom
JP127  LOGO-SFESK  [SFE-LOGO-FLAME]  132.97,34.04 270 bottom
JP128  [1X06-SMD-FEMALE-V2]  121.54,33.27 90 bottom
JP129  FIDUCIAL1X2  [FIDUCIAL-1X2]  117.6,25.88 0 top
JP130  FIDUCIAL1X2  [FIDUCIAL-1X2]  135.33,41 0 top
JP131  FIDUCIAL1X2  [FIDUCIAL-1X2]  115.21,27.03 0 bottom
JP132  FIDUCIAL1X2  [FIDUCIAL-1X2]  135.33,41 0 bottom
JP133  LOGO-SFESK  [SFE-LOGO-FLAME]  132.97,51.82 270 bottom
JP134  [1X06-SMD-FEMALE-V2]  121.54,51.05 90 bottom
JP135  FIDUCIAL1X2  [FIDUCIAL-1X2]  117.6,43.66 0 top
JP136  FIDUCIAL1X2  [FIDUCIAL-1X2]  135.33,58.78 0 top
JP137  FIDUCIAL1X2  [FIDUCIAL-1X2]  115.21,44.81 0 bottom
JP138  FIDUCIAL1X2  [FIDUCIAL-1X2]  135.33,58.78 0 bottom
JP139  LOGO-SFESK  [SFE-LOGO-FLAME]  132.97,69.6 270 bottom
JP140  [1X06-SMD-FEMALE-V2]  121.54,68.83 90 bottom
JP141  FIDUCIAL1X2  [FIDUCIAL-1X2]  117.6,61.44 0 top
JP142  FIDUCIAL1X2  [FIDUCIAL-1X2]  135.33,76.56 0 top
JP143  FIDUCIAL1X2  [FIDUCIAL-1X2]  115.21,62.59 0 bottom
JP144  FIDUCIAL1X2  [FIDUCIAL-1X2]  135.33,76.56 0 bottom
JP145  LOGO-SFESK  [SFE-LOGO-FLAME]  132.97,87.38 270 bottom
JP146  [1X06-SMD-FEMALE-V2]  121.54,86.61 90 bottom
JP147  FIDUCIAL1X2  [FIDUCIAL-1X2]  117.6,79.22 0 top
JP148  FIDUCIAL1X2  [FIDUCIAL-1X2]  135.33,94.34 0 top
JP149  FIDUCIAL1X2  [FIDUCIAL-1X2]  115.21,80.37 0 bottom
JP150  FIDUCIAL1X2  [FIDUCIAL-1X2]  135.33,94.34 0 bottom
JP151  LOGO-SFESK  [SFE-LOGO-FLAME]  159.64,16.26 270 bottom
JP152  [1X06-SMD-FEMALE-V2]  148.21,15.49 90 bottom
JP153  FIDUCIAL1X2  [FIDUCIAL-1X2]  144.27,8.1 0 top
JP154  FIDUCIAL1X2  [FIDUCIAL-1X2]  162,23.22 0 top
JP155  FIDUCIAL1X2  [FIDUCIAL-1X2]  141.88,9.25 0 bottom
JP156  FIDUCIAL1X2  [FIDUCIAL-1X2]  162,23.22 0 bottom
JP157  LOGO-SFESK  [SFE-LOGO-FLAME]  159.64,34.04 270 bottom
JP158  [1X06-SMD-FEMALE-V2]  148.21,33.27 90 bottom
JP159  FIDUCIAL1X2  [FIDUCIAL-1X2]  144.27,25.88 0 top
JP160  FIDUCIAL1X2  [FIDUCIAL-1X2]  162,41 0 top
JP161  FIDUCIAL1X2  [FIDUCIAL-1X2]  141.88,27.03 0 bottom
JP162  FIDUCIAL1X2  [FIDUCIAL-1X2]  162,41 0 bottom
JP163  LOGO-SFESK  [SFE-LOGO-FLAME]  159.64,51.82 270 bottom
JP164  [1X06-SMD-FEMALE-V2]  148.21,51.05 90 bottom
JP165  FIDUCIAL1X2  [FIDUCIAL-1X2]  144.27,43.66 0 top
JP166  FIDUCIAL1X2  [FIDUCIAL-1X2]  162,58.78 0 top
JP167  FIDUCIAL1X2  [FIDUCIAL-1X2]  141.88,44.81 0 bottom
JP168  FIDUCIAL1X2  [FIDUCIAL-1X2]  162,58.78 0 bottom
JP169  LOGO-SFESK  [SFE-LOGO-FLAME]  159.64,69.6 270 bottom
JP170  [1X06-SMD-FEMALE-V2]  148.21,68.83 90 bottom
JP171  FIDUCIAL1X2  [FIDUCIAL-1X2]  144.27,61.44 0 top
JP172  FIDUCIAL1X2  [FIDUCIAL-1X2]  162,76.56 0 top
JP173  FIDUCIAL1X2  [FIDUCIAL-1X2]  141.88,62.59 0 bottom
JP174  FIDUCIAL1X2  [FIDUCIAL-1X2]  162,76.56 0 bottom
JP175  LOGO-SFESK  [SFE-LOGO-FLAME]  159.64,87.38 270 bottom
JP176  [1X06-SMD-FEMALE-V2]  148.21,86.61 90 bottom
JP177  FIDUCIAL1X2  [FIDUCIAL-1X2]  144.27,79.22 0 top
JP178  FIDUCIAL1X2  [FIDUCIAL-1X2]  162,94.34 0 top
JP179  FIDUCIAL1X2  [FIDUCIAL-1X2]  141.88,80.37 0 bottom
JP180  FIDUCIAL1X2  [FIDUCIAL-1X2]  162,94.34 0 bottom
JP181  LOGO-SFESK  [SFE-LOGO-FLAME]  186.31,16.26 270 bottom
JP182  [1X06-SMD-FEMALE-V2]  174.88,15.49 90 bottom
JP183  FIDUCIAL1X2  [FIDUCIAL-1X2]  170.94,8.1 0 top
JP184  FIDUCIAL1X2  [FIDUCIAL-1X2]  188.67,23.22 0 top
JP185  FIDUCIAL1X2  [FIDUCIAL-1X2]  168.55,9.25 0 bottom
JP186  FIDUCIAL1X2  [FIDUCIAL-1X2]  188.67,23.22 0 bottom
JP187  LOGO-SFESK  [SFE-LOGO-FLAME]  186.31,34.04 270 bottom
JP188  [1X06-SMD-FEMALE-V2]  174.88,33.27 90 bottom
JP189  FIDUCIAL1X2  [FIDUCIAL-1X2]  170.94,25.88 0 top
JP190  FIDUCIAL1X2  [FIDUCIAL-1X2]  188.67,41 0 top
JP191  FIDUCIAL1X2  [FIDUCIAL-1X2]  168.55,27.03 0 bottom
JP192  FIDUCIAL1X2  [FIDUCIAL-1X2]  188.67,41 0 bottom
JP193  LOGO-SFESK  [SFE-LOGO-FLAME]  186.31,51.82 270 bottom
JP194  [1X06-SMD-FEMALE-V2]  174.88,51.05 90 bottom
JP195  FIDUCIAL1X2  [FIDUCIAL-1X2]  170.94,43.66 0 top
JP196  FIDUCIAL1X2  [FIDUCIAL-1X2]  188.67,58.78 0 top
JP197  FIDUCIAL1X2  [FIDUCIAL-1X2]  168.55,44.81 0 bottom
JP198  FIDUCIAL1X2  [FIDUCIAL-1X2]  188.67,58.78 0 bottom
JP199  LOGO-SFESK  [SFE-LOGO-FLAME]  186.31,69.6 270 bottom
JP200  [1X06-SMD-FEMALE-V2]  174.88,68.83 90 bottom
JP201  FIDUCIAL1X2  [FIDUCIAL-1X2]  170.94,61.44 0 top
JP202  FIDUCIAL1X2  [FIDUCIAL-1X2]  188.67,76.56 0 top
JP203  FIDUCIAL1X2  [FIDUCIAL-1X2]  168.55,62.59 0 bottom
JP204  FIDUCIAL1X2  [FIDUCIAL-1X2]  188.67,76.56 0 bottom
JP205  LOGO-SFESK  [SFE-LOGO-FLAME]  186.31,87.38 270 bottom
JP206  [1X06-SMD-FEMALE-V2]  174.88,86.61 90 bottom
JP207  FIDUCIAL1X2  [FIDUCIAL-1X2]  170.94,79.22 0 top
JP208  FIDUCIAL1X2  [FIDUCIAL-1X2]  188.67,94.34 0 top
JP209  FIDUCIAL1X2  [FIDUCIAL-1X2]  168.55,80.37 0 bottom
JP210  FIDUCIAL1X2  [FIDUCIAL-1X2]  188.67,94.34 0 bottom
JP211  LOGO-SFESK  [SFE-LOGO-FLAME]  212.98,16.26 270 bottom
JP212  [1X06-SMD-FEMALE-V2]  201.55,15.49 90 bottom
JP213  FIDUCIAL1X2  [FIDUCIAL-1X2]  197.61,8.1 0 top
JP214  FIDUCIAL1X2  [FIDUCIAL-1X2]  215.34,23.22 0 top
JP215  FIDUCIAL1X2  [FIDUCIAL-1X2]  195.22,9.25 0 bottom
JP216  FIDUCIAL1X2  [FIDUCIAL-1X2]  215.34,23.22 0 bottom
JP217  LOGO-SFESK  [SFE-LOGO-FLAME]  212.98,34.04 270 bottom
JP218  [1X06-SMD-FEMALE-V2]  201.55,33.27 90 bottom
JP219  FIDUCIAL1X2  [FIDUCIAL-1X2]  197.61,25.88 0 top
JP220  FIDUCIAL1X2  [FIDUCIAL-1X2]  215.34,41 0 top
JP221  FIDUCIAL1X2  [FIDUCIAL-1X2]  195.22,27.03 0 bottom
JP222  FIDUCIAL1X2  [FIDUCIAL-1X2]  215.34,41 0 bottom
JP223  LOGO-SFESK  [SFE-LOGO-FLAME]  212.98,51.82 270 bottom
JP224  [1X06-SMD-FEMALE-V2]  201.55,51.05 90 bottom
JP225  FIDUCIAL1X2  [FIDUCIAL-1X2]  197.61,43.66 0 top
JP226  FIDUCIAL1X2  [FIDUCIAL-1X2]  215.34,58.78 0 top
JP227  FIDUCIAL1X2  [FIDUCIAL-1X2]  195.22,44.81 0 bottom
JP228  FIDUCIAL1X2  [FIDUCIAL-1X2]  215.34,58.78 0 bottom
JP229  LOGO-SFESK  [SFE-LOGO-FLAME]  212.98,69.6 270 bottom
JP230  [1X06-SMD-FEMALE-V2]  201.55,68.83 90 bottom
JP231  FIDUCIAL1X2  [FIDUCIAL-1X2]  197.61,61.44 0 top
JP232  FIDUCIAL1X2  [FIDUCIAL-1X2]  215.34,76.56 0 top
JP233  FIDUCIAL1X2  [FIDUCIAL-1X2]  195.22,62.59 0 bottom
JP234  FIDUCIAL1X2  [FIDUCIAL-1X2]  215.34,76.56 0 bottom
JP235  LOGO-SFESK  [SFE-LOGO-FLAME]  212.98,87.38 270 bottom
JP236  [1X06-SMD-FEMALE-V2]  201.55,86.61 90 bottom
JP237  FIDUCIAL1X2  [FIDUCIAL-1X2]  197.61,79.22 0 top
JP238  FIDUCIAL1X2  [FIDUCIAL-1X2]  215.34,94.34 0 top
JP239  FIDUCIAL1X2  [FIDUCIAL-1X2]  195.22,80.37 0 bottom
JP240  FIDUCIAL1X2  [FIDUCIAL-1X2]  215.34,94.34 0 bottom
JP241  LOGO-SFESK  [SFE-LOGO-FLAME]  239.65,16.26 270 bottom
JP242  [1X06-SMD-FEMALE-V2]  228.22,15.49 90 bottom
JP243  FIDUCIAL1X2  [FIDUCIAL-1X2]  224.28,8.1 0 top
JP244  FIDUCIAL1X2  [FIDUCIAL-1X2]  242.01,23.22 0 top
JP245  FIDUCIAL1X2  [FIDUCIAL-1X2]  221.89,9.25 0 bottom
JP246  FIDUCIAL1X2  [FIDUCIAL-1X2]  242.01,23.22 0 bottom
JP247  LOGO-SFESK  [SFE-LOGO-FLAME]  239.65,34.04 270 bottom
JP248  [1X06-SMD-FEMALE-V2]  228.22,33.27 90 bottom
JP249  FIDUCIAL1X2  [FIDUCIAL-1X2]  224.28,25.88 0 top
JP250  FIDUCIAL1X2  [FIDUCIAL-1X2]  242.01,41 0 top
JP251  FIDUCIAL1X2  [FIDUCIAL-1X2]  221.89,27.03 0 bottom
JP252  FIDUCIAL1X2  [FIDUCIAL-1X2]  242.01,41 0 bottom
JP253  LOGO-SFESK  [SFE-LOGO-FLAME]  239.65,51.82 270 bottom
JP254  [1X06-SMD-FEMALE-V2]  228.22,51.05 90 bottom
JP255  FIDUCIAL1X2  [FIDUCIAL-1X2]  224.28,43.66 0 top
JP256  FIDUCIAL1X2  [FIDUCIAL-1X2]  242.01,58.78 0 top
JP257  FIDUCIAL1X2  [FIDUCIAL-1X2]  221.89,44.81 0 bottom
JP258  FIDUCIAL1X2  [FIDUCIAL-1X2]  242.01,58.78 0 bottom
JP259  LOGO-SFESK  [SFE-LOGO-FLAME]  239.65,69.6 270 bottom
JP260  [1X06-SMD-FEMALE-V2]  228.22,68.83 90 bottom
JP261  FIDUCIAL1X2  [FIDUCIAL-1X2]  224.28,61.44 0 top
JP262  FIDUCIAL1X2  [FIDUCIAL-1X2]  242.01,76.56 0 top
JP263  FIDUCIAL1X2  [FIDUCIAL-1X2]  221.89,62.59 0 bottom
JP264  FIDUCIAL1X2  [FIDUCIAL-1X2]  242.01,76.56 0 bottom
JP265  LOGO-SFESK  [SFE-LOGO-FLAME]  239.65,87.38 270 bottom
JP266  [1X06-SMD-FEMALE-V2]  228.22,86.61 90 bottom
JP267  FIDUCIAL1X2  [FIDUCIAL-1X2]  224.28,79.22 0 top
JP268  FIDUCIAL1X2  [FIDUCIAL-1X2]  242.01,94.34 0 top
JP269  FIDUCIAL1X2  [FIDUCIAL-1X2]  221.89,80.37 0 bottom
JP270  FIDUCIAL1X2  [FIDUCIAL-1X2]  242.01,94.34 0 bottom
JP271  LOGO-SFESK  [SFE-LOGO-FLAME]  266.32,16.26 270 bottom
JP272  [1X06-SMD-FEMALE-V2]  254.89,15.49 90 bottom
JP273  FIDUCIAL1X2  [FIDUCIAL-1X2]  250.95,8.1 0 top
JP274  FIDUCIAL1X2  [FIDUCIAL-1X2]  268.68,23.22 0 top
JP275  FIDUCIAL1X2  [FIDUCIAL-1X2]  248.56,9.25 0 bottom
JP276  FIDUCIAL1X2  [FIDUCIAL-1X2]  268.68,23.22 0 bottom
JP277  LOGO-SFESK  [SFE-LOGO-FLAME]  266.32,34.04 270 bottom
JP278  [1X06-SMD-FEMALE-V2]  254.89,33.27 90 bottom
JP279  FIDUCIAL1X2  [FIDUCIAL-1X2]  250.95,25.88 0 top
JP280  FIDUCIAL1X2  [FIDUCIAL-1X2]  268.68,41 0 top
JP281  FIDUCIAL1X2  [FIDUCIAL-1X2]  248.56,27.03 0 bottom
JP282  FIDUCIAL1X2  [FIDUCIAL-1X2]  268.68,41 0 bottom
JP283  LOGO-SFESK  [SFE-LOGO-FLAME]  266.32,51.82 270 bottom
JP284  [1X06-SMD-FEMALE-V2]  254.89,51.05 90 bottom
JP285  FIDUCIAL1X2  [FIDUCIAL-1X2]  250.95,43.66 0 top
JP286  FIDUCIAL1X2  [FIDUCIAL-1X2]  268.68,58.78 0 top
JP287  FIDUCIAL1X2  [FIDUCIAL-1X2]  248.56,44.81 0 bottom
JP288  FIDUCIAL1X2  [FIDUCIAL-1X2]  268.68,58.78 0 bottom
JP289  LOGO-SFESK  [SFE-LOGO-FLAME]  266.32,69.6 270 bottom
JP290  [1X06-SMD-FEMALE-V2]  254.89,68.83 90 bottom
JP291  FIDUCIAL1X2  [FIDUCIAL-1X2]  250.95,61.44 0 top
JP292  FIDUCIAL1X2  [FIDUCIAL-1X2]  268.68,76.56 0 top
JP293  FIDUCIAL1X2  [FIDUCIAL-1X2]  248.56,62.59 0 bottom
JP294  FIDUCIAL1X2  [FIDUCIAL-1X2]  268.68,76.56 0 bottom
JP295  LOGO-SFESK  [SFE-LOGO-FLAME]  266.32,87.38 270 bottom
JP296  [1X06-SMD-FEMALE-V2]  254.89,86.61 90 bottom
JP297  FIDUCIAL1X2  [FIDUCIAL-1X2]  250.95,79.22 0 top
JP298  FIDUCIAL1X2  [FIDUCIAL-1X2]  268.68,94.34 0 top
JP299  FIDUCIAL1X2  [FIDUCIAL-1X2]  248.56,80.37 0 bottom
JP300  FIDUCIAL1X2  [FIDUCIAL-1X2]  268.68,94.34 0 bottom
JP301  LOGO-SFESK  [SFE-LOGO-FLAME]  26.29,109.47 270 bottom
JP302  [1X06-SMD-FEMALE-V2]  14.86,108.71 90 bottom
JP303  FIDUCIAL1X2  [FIDUCIAL-1X2]  10.92,101.32 0 top
JP304  FIDUCIAL1X2  [FIDUCIAL-1X2]  28.65,116.43 0 top
JP305  FIDUCIAL1X2  [FIDUCIAL-1X2]  8.53,102.46 0 bottom
JP306  FIDUCIAL1X2  [FIDUCIAL-1X2]  28.65,116.43 0 bottom
JP307  LOGO-SFESK  [SFE-LOGO-FLAME]  26.29,127.25 270 bottom
JP308  [1X06-SMD-FEMALE-V2]  14.86,126.49 90 bottom
JP309  FIDUCIAL1X2  [FIDUCIAL-1X2]  10.92,119.1 0 top
JP310  FIDUCIAL1X2  [FIDUCIAL-1X2]  28.65,134.21 0 top
JP311  FIDUCIAL1X2  [FIDUCIAL-1X2]  8.53,120.24 0 bottom
JP312  FIDUCIAL1X2  [FIDUCIAL-1X2]  28.65,134.21 0 bottom
JP313  LOGO-SFESK  [SFE-LOGO-FLAME]  26.29,145.03 270 bottom
JP314  [1X06-SMD-FEMALE-V2]  14.86,144.27 90 bottom
JP315  FIDUCIAL1X2  [FIDUCIAL-1X2]  10.92,136.88 0 top
JP316  FIDUCIAL1X2  [FIDUCIAL-1X2]  28.65,151.99 0 top
JP317  FIDUCIAL1X2  [FIDUCIAL-1X2]  8.53,138.02 0 bottom
JP318  FIDUCIAL1X2  [FIDUCIAL-1X2]  28.65,151.99 0 bottom
JP319  LOGO-SFESK  [SFE-LOGO-FLAME]  26.29,162.81 270 bottom
JP320  [1X06-SMD-FEMALE-V2]  14.86,162.05 90 bottom
JP321  FIDUCIAL1X2  [FIDUCIAL-1X2]  10.92,154.66 0 top
JP322  FIDUCIAL1X2  [FIDUCIAL-1X2]  28.65,169.77 0 top
JP323  FIDUCIAL1X2  [FIDUCIAL-1X2]  8.53,155.8 0 bottom
JP324  FIDUCIAL1X2  [FIDUCIAL-1X2]  28.65,169.77 0 bottom
JP325  LOGO-SFESK  [SFE-LOGO-FLAME]  26.29,180.59 270 bottom
JP326  [1X06-SMD-FEMALE-V2]  14.86,179.83 90 bottom
JP327  FIDUCIAL1X2  [FIDUCIAL-1X2]  10.92,172.44 0 top
JP328  FIDUCIAL1X2  [FIDUCIAL-1X2]  28.65,187.55 0 top
JP329  FIDUCIAL1X2  [FIDUCIAL-1X2]  8.53,173.58 0 bottom
JP330  FIDUCIAL1X2  [FIDUCIAL-1X2]  28.65,187.55 0 bottom
JP331  LOGO-SFESK  [SFE-LOGO-FLAME]  52.96,109.47 270 bottom
JP332  [1X06-SMD-FEMALE-V2]  41.53,108.71 90 bottom
JP333  FIDUCIAL1X2  [FIDUCIAL-1X2]  37.59,101.32 0 top
JP334  FIDUCIAL1X2  [FIDUCIAL-1X2]  55.32,116.43 0 top
JP335  FIDUCIAL1X2  [FIDUCIAL-1X2]  35.2,102.46 0 bottom
JP336  FIDUCIAL1X2  [FIDUCIAL-1X2]  55.32,116.43 0 bottom
JP337  LOGO-SFESK  [SFE-LOGO-FLAME]  52.96,127.25 270 bottom
JP338  [1X06-SMD-FEMALE-V2]  41.53,126.49 90 bottom
JP339  FIDUCIAL1X2  [FIDUCIAL-1X2]  37.59,119.1 0 top
JP340  FIDUCIAL1X2  [FIDUCIAL-1X2]  55.32,134.21 0 top
JP341  FIDUCIAL1X2  [FIDUCIAL-1X2]  35.2,120.24 0 bottom
JP342  FIDUCIAL1X2  [FIDUCIAL-1X2]  55.32,134.21 0 bottom
JP343  LOGO-SFESK  [SFE-LOGO-FLAME]  52.96,145.03 270 bottom
JP344  [1X06-SMD-FEMALE-V2]  41.53,144.27 90 bottom
JP345  FIDUCIAL1X2  [FIDUCIAL-1X2]  37.59,136.88 0 top
JP346  FIDUCIAL1X2  [FIDUCIAL-1X2]  55.32,151.99 0 top
JP347  FIDUCIAL1X2  [FIDUCIAL-1X2]  35.2,138.02 0 bottom
JP348  FIDUCIAL1X2  [FIDUCIAL-1X2]  55.32,151.99 0 bottom
JP349  LOGO-SFESK  [SFE-LOGO-FLAME]  52.96,162.81 270 bottom
JP350  [1X06-SMD-FEMALE-V2]  41.53,162.05 90 bottom
JP351  FIDUCIAL1X2  [FIDUCIAL-1X2]  37.59,154.66 0 top
JP352  FIDUCIAL1X2  [FIDUCIAL-1X2]  55.32,169.77 0 top
JP353  FIDUCIAL1X2  [FIDUCIAL-1X2]  35.2,155.8 0 bottom
JP354  FIDUCIAL1X2  [FIDUCIAL-1X2]  55.32,169.77 0 bottom
JP355  LOGO-SFESK  [SFE-LOGO-FLAME]  52.96,180.59 270 bottom
JP356  [1X06-SMD-FEMALE-V2]  41.53,179.83 90 bottom
JP357  FIDUCIAL1X2  [FIDUCIAL-1X2]  37.59,172.44 0 top
JP358  FIDUCIAL1X2  [FIDUCIAL-1X2]  55.32,187.55 0 top
JP359  FIDUCIAL1X2  [FIDUCIAL-1X2]  35.2,173.58 0 bottom
JP360  FIDUCIAL1X2  [FIDUCIAL-1X2]  55.32,187.55 0 bottom
JP361  LOGO-SFESK  [SFE-LOGO-FLAME]  79.63,109.47 270 bottom
JP362  [1X06-SMD-FEMALE-V2]  68.2,108.71 90 bottom
JP363  FIDUCIAL1X2  [FIDUCIAL-1X2]  64.26,101.32 0 top
JP364  FIDUCIAL1X2  [FIDUCIAL-1X2]  81.99,116.43 0 top
JP365  FIDUCIAL1X2  [FIDUCIAL-1X2]  61.87,102.46 0 bottom
JP366  FIDUCIAL1X2  [FIDUCIAL-1X2]  81.99,116.43 0 bottom
JP367  LOGO-SFESK  [SFE-LOGO-FLAME]  79.63,127.25 270 bottom
JP368  [1X06-SMD-FEMALE-V2]  68.2,126.49 90 bottom
JP369  FIDUCIAL1X2  [FIDUCIAL-1X2]  64.26,119.1 0 top
JP370  FIDUCIAL1X2  [FIDUCIAL-1X2]  81.99,134.21 0 top
JP371  FIDUCIAL1X2  [FIDUCIAL-1X2]  61.87,120.24 0 bottom
JP372  FIDUCIAL1X2  [FIDUCIAL-1X2]  81.99,134.21 0 bottom
JP373  LOGO-SFESK  [SFE-LOGO-FLAME]  79.63,145.03 270 bottom
JP374  [1X06-SMD-FEMALE-V2]  68.2,144.27 90 bottom
JP375  FIDUCIAL1X2  [FIDUCIAL-1X2]  64.26,136.88 0 top
JP376  FIDUCIAL1X2  [FIDUCIAL-1X2]  81.99,151.99 0 top
JP377  FIDUCIAL1X2  [FIDUCIAL-1X2]  61.87,138.02 0 bottom
JP378  FIDUCIAL1X2  [FIDUCIAL-1X2]  81.99,151.99 0 bottom
JP379  LOGO-SFESK  [SFE-LOGO-FLAME]  79.63,162.81 270 bottom
JP380  [1X06-SMD-FEMALE-V2]  68.2,162.05 90 bottom
JP381  FIDUCIAL1X2  [FIDUCIAL-1X2]  64.26,154.66 0 top
JP382  FIDUCIAL1X2  [FIDUCIAL-1X2]  81.99,169.77 0 top
JP383  FIDUCIAL1X2  [FIDUCIAL-1X2]  61.87,155.8 0 bottom
JP384  FIDUCIAL1X2  [FIDUCIAL-1X2]  81.99,169.77 0 bottom
JP385  LOGO-SFESK  [SFE-LOGO-FLAME]  79.63,180.59 270 bottom
JP386  [1X06-SMD-FEMALE-V2]  68.2,179.83 90 bottom
JP387  FIDUCIAL1X2  [FIDUCIAL-1X2]  64.26,172.44 0 top
JP388  FIDUCIAL1X2  [FIDUCIAL-1X2]  81.99,187.55 0 top
JP389  FIDUCIAL1X2  [FIDUCIAL-1X2]  61.87,173.58 0 bottom
JP390  FIDUCIAL1X2  [FIDUCIAL-1X2]  81.99,187.55 0 bottom
JP391  LOGO-SFESK  [SFE-LOGO-FLAME]  106.3,109.47 270 bottom
JP392  [1X06-SMD-FEMALE-V2]  94.87,108.71 90 bottom
JP393  FIDUCIAL1X2  [FIDUCIAL-1X2]  90.93,101.32 0 top
JP394  FIDUCIAL1X2  [FIDUCIAL-1X2]  108.66,116.43 0 top
JP395  FIDUCIAL1X2  [FIDUCIAL-1X2]  88.54,102.46 0 bottom
JP396  FIDUCIAL1X2  [FIDUCIAL-1X2]  108.66,116.43 0 bottom
JP397  LOGO-SFESK  [SFE-LOGO-FLAME]  106.3,127.25 270 bottom
JP398  [1X06-SMD-FEMALE-V2]  94.87,126.49 90 bottom
JP399  FIDUCIAL1X2  [FIDUCIAL-1X2]  90.93,119.1 0 top
JP400  FIDUCIAL1X2  [FIDUCIAL-1X2]  108.66,134.21 0 top
JP401  FIDUCIAL1X2  [FIDUCIAL-1X2]  88.54,120.24 0 bottom
JP402  FIDUCIAL1X2  [FIDUCIAL-1X2]  108.66,134.21 0 bottom
JP403  LOGO-SFESK  [SFE-LOGO-FLAME]  106.3,145.03 270 bottom
JP404  [1X06-SMD-FEMALE-V2]  94.87,144.27 90 bottom
JP405  FIDUCIAL1X2  [FIDUCIAL-1X2]  90.93,136.88 0 top
JP406  FIDUCIAL1X2  [FIDUCIAL-1X2]  108.66,151.99 0 top
JP407  FIDUCIAL1X2  [FIDUCIAL-1X2]  88.54,138.02 0 bottom
JP408  FIDUCIAL1X2  [FIDUCIAL-1X2]  108.66,151.99 0 bottom
JP409  LOGO-SFESK  [SFE-LOGO-FLAME]  106.3,162.81 270 bottom
JP410  [1X06-SMD-FEMALE-V2]  94.87,162.05 90 bottom
JP411  FIDUCIAL1X2  [FIDUCIAL-1X2]  90.93,154.66 0 top
JP412  FIDUCIAL1X2  [FIDUCIAL-1X2]  108.66,169.77 0 top
JP413  FIDUCIAL1X2  [FIDUCIAL-1X2]  88.54,155.8 0 bottom
JP414  FIDUCIAL1X2  [FIDUCIAL-1X2]  108.66,169.77 0 bottom
JP415  LOGO-SFESK  [SFE-LOGO-FLAME]  106.3,180.59 270 bottom
JP416  [1X06-SMD-FEMALE-V2]  94.87,179.83 90 bottom
JP417  FIDUCIAL1X2  [FIDUCIAL-1X2]  90.93,172.44 0 top
JP418  FIDUCIAL1X2  [FIDUCIAL-1X2]  108.66,187.55 0 top
JP419  FIDUCIAL1X2  [FIDUCIAL-1X2]  88.54,173.58 0 bottom
JP420  FIDUCIAL1X2  [FIDUCIAL-1X2]  108.66,187.55 0 bottom
JP421  LOGO-SFESK  [SFE-LOGO-FLAME]  132.97,109.47 270 bottom
JP422  [1X06-SMD-FEMALE-V2]  121.54,108.71 90 bottom
JP423  FIDUCIAL1X2  [FIDUCIAL-1X2]  117.6,101.32 0 top
JP424  FIDUCIAL1X2  [FIDUCIAL-1X2]  135.33,116.43 0 top
JP425  FIDUCIAL1X2  [FIDUCIAL-1X2]  115.21,102.46 0 bottom
JP426  FIDUCIAL1X2  [FIDUCIAL-1X2]  135.33,116.43 0 bottom
JP427  LOGO-SFESK  [SFE-LOGO-FLAME]  132.97,127.25 270 bottom
JP428  [1X06-SMD-FEMALE-V2]  121.54,126.49 90 bottom
JP429  FIDUCIAL1X2  [FIDUCIAL-1X2]  117.6,119.1 0 top
JP430  FIDUCIAL1X2  [FIDUCIAL-1X2]  135.33,134.21 0 top
JP431  FIDUCIAL1X2  [FIDUCIAL-1X2]  115.21,120.24 0 bottom
JP432  FIDUCIAL1X2  [FIDUCIAL-1X2]  135.33,134.21 0 bottom
JP433  LOGO-SFESK  [SFE-LOGO-FLAME]  132.97,145.03 270 bottom
JP434  [1X06-SMD-FEMALE-V2]  121.54,144.27 90 bottom
JP435  FIDUCIAL1X2  [FIDUCIAL-1X2]  117.6,136.88 0 top
JP436  FIDUCIAL1X2  [FIDUCIAL-1X2]  135.33,151.99 0 top
JP437  FIDUCIAL1X2  [FIDUCIAL-1X2]  115.21,138.02 0 bottom
JP438  FIDUCIAL1X2  [FIDUCIAL-1X2]  135.33,151.99 0 bottom
JP439  LOGO-SFESK  [SFE-LOGO-FLAME]  132.97,162.81 270 bottom
JP440  [1X06-SMD-FEMALE-V2]  121.54,162.05 90 bottom
JP441  FIDUCIAL1X2  [FIDUCIAL-1X2]  117.6,154.66 0 top
JP442  FIDUCIAL1X2  [FIDUCIAL-1X2]  135.33,169.77 0 top
JP443  FIDUCIAL1X2  [FIDUCIAL-1X2]  115.21,155.8 0 bottom
JP444  FIDUCIAL1X2  [FIDUCIAL-1X2]  135.33,169.77 0 bottom
JP445  LOGO-SFESK  [SFE-LOGO-FLAME]  132.97,180.59 270 bottom
JP446  [1X06-SMD-FEMALE-V2]  121.54,179.83 90 bottom
JP447  FIDUCIAL1X2  [FIDUCIAL-1X2]  117.6,172.44 0 top
JP448  FIDUCIAL1X2  [FIDUCIAL-1X2]  135.33,187.55 0 top
JP449  FIDUCIAL1X2  [FIDUCIAL-1X2]  115.21,173.58 0 bottom
JP450  FIDUCIAL1X2  [FIDUCIAL-1X2]  135.33,187.55 0 bottom
JP451  LOGO-SFESK  [SFE-LOGO-FLAME]  159.64,109.47 270 bottom
JP452  [1X06-SMD-FEMALE-V2]  148.21,108.71 90 bottom
JP453  FIDUCIAL1X2  [FIDUCIAL-1X2]  144.27,101.32 0 top
JP454  FIDUCIAL1X2  [FIDUCIAL-1X2]  162,116.43 0 top
JP455  FIDUCIAL1X2  [FIDUCIAL-1X2]  141.88,102.46 0 bottom
JP456  FIDUCIAL1X2  [FIDUCIAL-1X2]  162,116.43 0 bottom
JP457  LOGO-SFESK  [SFE-LOGO-FLAME]  159.64,127.25 270 bottom
JP458  [1X06-SMD-FEMALE-V2]  148.21,126.49 90 bottom
JP459  FIDUCIAL1X2  [FIDUCIAL-1X2]  144.27,119.1 0 top
JP460  FIDUCIAL1X2  [FIDUCIAL-1X2]  162,134.21 0 top
JP461  FIDUCIAL1X2  [FIDUCIAL-1X2]  141.88,120.24 0 bottom
JP462  FIDUCIAL1X2  [FIDUCIAL-1X2]  162,134.21 0 bottom
JP463  LOGO-SFESK  [SFE-LOGO-FLAME]  159.64,145.03 270 bottom
JP464  [1X06-SMD-FEMALE-V2]  148.21,144.27 90 bottom
JP465  FIDUCIAL1X2  [FIDUCIAL-1X2]  144.27,136.88 0 top
JP466  FIDUCIAL1X2  [FIDUCIAL-1X2]  162,151.99 0 top
JP467  FIDUCIAL1X2  [FIDUCIAL-1X2]  141.88,138.02 0 bottom
JP468  FIDUCIAL1X2  [FIDUCIAL-1X2]  162,151.99 0 bottom
JP469  LOGO-SFESK  [SFE-LOGO-FLAME]  159.64,162.81 270 bottom
JP470  [1X06-SMD-FEMALE-V2]  148.21,162.05 90 bottom
JP471  FIDUCIAL1X2  [FIDUCIAL-1X2]  144.27,154.66 0 top
JP472  FIDUCIAL1X2  [FIDUCIAL-1X2]  162,169.77 0 top
JP473  FIDUCIAL1X2  [FIDUCIAL-1X2]  141.88,155.8 0 bottom
JP474  FIDUCIAL1X2  [FIDUCIAL-1X2]  162,169.77 0 bottom
JP475  LOGO-SFESK  [SFE-LOGO-FLAME]  159.64,180.59 270 bottom
JP476  [1X06-SMD-FEMALE-V2]  148.21,179.83 90 bottom
JP477  FIDUCIAL1X2  [FIDUCIAL-1X2]  144.27,172.44 0 top
JP478  FIDUCIAL1X2  [FIDUCIAL-1X2]  162,187.55 0 top
JP479  FIDUCIAL1X2  [FIDUCIAL-1X2]  141.88,173.58 0 bottom
JP480  FIDUCIAL1X2  [FIDUCIAL-1X2]  162,187.55 0 bottom
JP481  LOGO-SFESK  [SFE-LOGO-FLAME]  186.31,109.47 270 bottom
JP482  [1X06-SMD-FEMALE-V2]  174.88,108.71 90 bottom
JP483  FIDUCIAL1X2  [FIDUCIAL-1X2]  170.94,101.32 0 top
JP484  FIDUCIAL1X2  [FIDUCIAL-1X2]  188.67,116.43 0 top
JP485  FIDUCIAL1X2  [FIDUCIAL-1X2]  168.55,102.46 0 bottom
JP486  FIDUCIAL1X2  [FIDUCIAL-1X2]  188.67,116.43 0 bottom
JP487  LOGO-SFESK  [SFE-LOGO-FLAME]  186.31,127.25 270 bottom
JP488  [1X06-SMD-FEMALE-V2]  174.88,126.49 90 bottom
JP489  FIDUCIAL1X2  [FIDUCIAL-1X2]  170.94,119.1 0 top
JP490  FIDUCIAL1X2  [FIDUCIAL-1X2]  188.67,134.21 0 top
JP491  FIDUCIAL1X2  [FIDUCIAL-1X2]  168.55,120.24 0 bottom
JP492  FIDUCIAL1X2  [FIDUCIAL-1X2]  188.67,134.21 0 bottom
JP493  LOGO-SFESK  [SFE-LOGO-FLAME]  186.31,145.03 270 bottom
JP494  [1X06-SMD-FEMALE-V2]  174.88,144.27 90 bottom
JP495  FIDUCIAL1X2  [FIDUCIAL-1X2]  170.94,136.88 0 top
JP496  FIDUCIAL1X2  [FIDUCIAL-1X2]  188.67,151.99 0 top
JP497  FIDUCIAL1X2  [FIDUCIAL-1X2]  168.55,138.02 0 bottom
JP498  FIDUCIAL1X2  [FIDUCIAL-1X2]  188.67,151.99 0 bottom
JP499  LOGO-SFESK  [SFE-LOGO-FLAME]  186.31,162.81 270 bottom
JP500  [1X06-SMD-FEMALE-V2]  174.88,162.05 90 bottom
JP501  FIDUCIAL1X2  [FIDUCIAL-1X2]  170.94,154.66 0 top
JP502  FIDUCIAL1X2  [FIDUCIAL-1X2]  188.67,169.77 0 top
JP503  FIDUCIAL1X2  [FIDUCIAL-1X2]  168.55,155.8 0 bottom
JP504  FIDUCIAL1X2  [FIDUCIAL-1X2]  188.67,169.77 0 bottom
JP505  LOGO-SFESK  [SFE-LOGO-FLAME]  186.31,180.59 270 bottom
JP506  [1X06-SMD-FEMALE-V2]  174.88,179.83 90 bottom
JP507  FIDUCIAL1X2  [FIDUCIAL-1X2]  170.94,172.44 0 top
JP508  FIDUCIAL1X2  [FIDUCIAL-1X2]  188.67,187.55 0 top
JP509  FIDUCIAL1X2  [FIDUCIAL-1X2]  168.55,173.58 0 bottom
JP510  FIDUCIAL1X2  [FIDUCIAL-1X2]  188.67,187.55 0 bottom
JP511  LOGO-SFESK  [SFE-LOGO-FLAME]  212.98,109.47 270 bottom
JP512  [1X06-SMD-FEMALE-V2]  201.55,108.71 90 bottom
JP513  FIDUCIAL1X2  [FIDUCIAL-1X2]  197.61,101.32 0 top
JP514  FIDUCIAL1X2  [FIDUCIAL-1X2]  215.34,116.43 0 top
JP515  FIDUCIAL1X2  [FIDUCIAL-1X2]  195.22,102.46 0 bottom
JP516  FIDUCIAL1X2  [FIDUCIAL-1X2]  215.34,116.43 0 bottom
JP517  LOGO-SFESK  [SFE-LOGO-FLAME]  212.98,127.25 270 bottom
JP518  [1X06-SMD-FEMALE-V2]  201.55,126.49 90 bottom
JP519  FIDUCIAL1X2  [FIDUCIAL-1X2]  197.61,119.1 0 top
JP520  FIDUCIAL1X2  [FIDUCIAL-1X2]  215.34,134.21 0 top
JP521  FIDUCIAL1X2  [FIDUCIAL-1X2]  195.22,120.24 0 bottom
JP522  FIDUCIAL1X2  [FIDUCIAL-1X2]  215.34,134.21 0 bottom
JP523  LOGO-SFESK  [SFE-LOGO-FLAME]  212.98,145.03 270 bottom
JP524  [1X06-SMD-FEMALE-V2]  201.55,144.27 90 bottom
JP525  FIDUCIAL1X2  [FIDUCIAL-1X2]  197.61,136.88 0 top
JP526  FIDUCIAL1X2  [FIDUCIAL-1X2]  215.34,151.99 0 top
JP527  FIDUCIAL1X2  [FIDUCIAL-1X2]  195.22,138.02 0 bottom
JP528  FIDUCIAL1X2  [FIDUCIAL-1X2]  215.34,151.99 0 bottom
JP529  LOGO-SFESK  [SFE-LOGO-FLAME]  212.98,162.81 270 bottom
JP530  [1X06-SMD-FEMALE-V2]  201.55,162.05 90 bottom
JP531  FIDUCIAL1X2  [FIDUCIAL-1X2]  197.61,154.66 0 top
JP532  FIDUCIAL1X2  [FIDUCIAL-1X2]  215.34,169.77 0 top
JP533  FIDUCIAL1X2  [FIDUCIAL-1X2]  195.22,155.8 0 bottom
JP534  FIDUCIAL1X2  [FIDUCIAL-1X2]  215.34,169.77 0 bottom
JP535  LOGO-SFESK  [SFE-LOGO-FLAME]  212.98,180.59 270 bottom
JP536  [1X06-SMD-FEMALE-V2]  201.55,179.83 90 bottom
JP537  FIDUCIAL1X2  [FIDUCIAL-1X2]  197.61,172.44 0 top
JP538  FIDUCIAL1X2  [FIDUCIAL-1X2]  215.34,187.55 0 top
JP539  FIDUCIAL1X2  [FIDUCIAL-1X2]  195.22,173.58 0 bottom
JP540  FIDUCIAL1X2  [FIDUCIAL-1X2]  215.34,187.55 0 bottom
JP541  LOGO-SFESK  [SFE-LOGO-FLAME]  239.65,109.47 270 bottom
JP542  [1X06-SMD-FEMALE-V2]  228.22,108.71 90 bottom
JP543  FIDUCIAL1X2  [FIDUCIAL-1X2]  224.28,101.32 0 top
JP544  FIDUCIAL1X2  [FIDUCIAL-1X2]  242.01,116.43 0 top
JP545  FIDUCIAL1X2  [FIDUCIAL-1X2]  221.89,102.46 0 bottom
JP546  FIDUCIAL1X2  [FIDUCIAL-1X2]  242.01,116.43 0 bottom
JP547  LOGO-SFESK  [SFE-LOGO-FLAME]  239.65,127.25 270 bottom
JP548  [1X06-SMD-FEMALE-V2]  228.22,126.49 90 bottom
JP549  FIDUCIAL1X2  [FIDUCIAL-1X2]  224.28,119.1 0 top
JP550  FIDUCIAL1X2  [FIDUCIAL-1X2]  242.01,134.21 0 top
JP551  FIDUCIAL1X2  [FIDUCIAL-1X2]  221.89,120.24 0 bottom
JP552  FIDUCIAL1X2  [FIDUCIAL-1X2]  242.01,134.21 0 bottom
JP553  LOGO-SFESK  [SFE-LOGO-FLAME]  239.65,145.03 270 bottom
JP554  [1X06-SMD-FEMALE-V2]  228.22,144.27 90 bottom
JP555  FIDUCIAL1X2  [FIDUCIAL-1X2]  224.28,136.88 0 top
JP556  FIDUCIAL1X2  [FIDUCIAL-1X2]  242.01,151.99 0 top
JP557  FIDUCIAL1X2  [FIDUCIAL-1X2]  221.89,138.02 0 bottom
JP558  FIDUCIAL1X2  [FIDUCIAL-1X2]  242.01,151.99 0 bottom
JP559  LOGO-SFESK  [SFE-LOGO-FLAME]  239.65,162.81 270 bottom
JP560  [1X06-SMD-FEMALE-V2]  228.22,162.05 90 bottom
JP561  FIDUCIAL1X2  [FIDUCIAL-1X2]  224.28,154.66 0 top
JP562  FIDUCIAL1X2  [FIDUCIAL-1X2]  242.01,169.77 0 top
JP563  FIDUCIAL1X2  [FIDUCIAL-1X2]  221.89,155.8 0 bottom
JP564  FIDUCIAL1X2  [FIDUCIAL-1X2]  242.01,169.77 0 bottom
JP565  LOGO-SFESK  [SFE-LOGO-FLAME]  239.65,180.59 270 bottom
JP566  [1X06-SMD-FEMALE-V2]  228.22,179.83 90 bottom
JP567  FIDUCIAL1X2  [FIDUCIAL-1X2]  224.28,172.44 0 top
JP568  FIDUCIAL1X2  [FIDUCIAL-1X2]  242.01,187.55 0 top
JP569  FIDUCIAL1X2  [FIDUCIAL-1X2]  221.89,173.58 0 bottom
JP570  FIDUCIAL1X2  [FIDUCIAL-1X2]  242.01,187.55 0 bottom
JP571  LOGO-SFESK  [SFE-LOGO-FLAME]  266.32,109.47 270 bottom
JP572  [1X06-SMD-FEMALE-V2]  254.89,108.71 90 bottom
JP573  FIDUCIAL1X2  [FIDUCIAL-1X2]  250.95,101.32 0 top
JP574  FIDUCIAL1X2  [FIDUCIAL-1X2]  268.68,116.43 0 top
JP575  FIDUCIAL1X2  [FIDUCIAL-1X2]  248.56,102.46 0 bottom
JP576  FIDUCIAL1X2  [FIDUCIAL-1X2]  268.68,116.43 0 bottom
JP577  LOGO-SFESK  [SFE-LOGO-FLAME]  266.32,127.25 270 bottom
JP578  [1X06-SMD-FEMALE-V2]  254.89,126.49 90 bottom
JP579  FIDUCIAL1X2  [FIDUCIAL-1X2]  250.95,119.1 0 top
JP580  FIDUCIAL1X2  [FIDUCIAL-1X2]  268.68,134.21 0 top
JP581  FIDUCIAL1X2  [FIDUCIAL-1X2]  248.56,120.24 0 bottom
JP582  FIDUCIAL1X2  [FIDUCIAL-1X2]  268.68,134.21 0 bottom
JP583  LOGO-SFESK  [SFE-LOGO-FLAME]  266.32,145.03 270 bottom
JP584  [1X06-SMD-FEMALE-V2]  254.89,144.27 90 bottom
JP585  FIDUCIAL1X2  [FIDUCIAL-1X2]  250.95,136.88 0 top
JP586  FIDUCIAL1X2  [FIDUCIAL-1X2]  268.68,151.99 0 top
JP587  FIDUCIAL1X2  [FIDUCIAL-1X2]  248.56,138.02 0 bottom
JP588  FIDUCIAL1X2  [FIDUCIAL-1X2]  268.68,151.99 0 bottom
JP589  LOGO-SFESK  [SFE-LOGO-FLAME]  266.32,162.81 270 bottom
JP590  [1X06-SMD-FEMALE-V2]  254.89,162.05 90 bottom
JP591  FIDUCIAL1X2  [FIDUCIAL-1X2]  250.95,154.66 0 top
JP592  FIDUCIAL1X2  [FIDUCIAL-1X2]  268.68,169.77 0 top
JP593  FIDUCIAL1X2  [FIDUCIAL-1X2]  248.56,155.8 0 bottom
JP594  FIDUCIAL1X2  [FIDUCIAL-1X2]  268.68,169.77 0 bottom
JP595  LOGO-SFESK  [SFE-LOGO-FLAME]  266.32,180.59 270 bottom
JP596  [1X06-SMD-FEMALE-V2]  254.89,179.83 90 bottom
JP597  FIDUCIAL1X2  [FIDUCIAL-1X2]  250.95,172.44 0 top
JP598  FIDUCIAL1X2  [FIDUCIAL-1X2]  268.68,187.55 0 top
JP599  FIDUCIAL1X2  [FIDUCIAL-1X2]  248.56,173.58 0 bottom
JP600  FIDUCIAL1X2  [FIDUCIAL-1X2]  268.68,187.55 0 bottom
LED1  Red  [LED-0603]  13.84,22.35 270 top
LED2  Green  [LED-0603]  16.51,22.35 90 top
LED3  Red  [LED-0603]  13.84,40.13 270 top
LED4  Green  [LED-0603]  16.51,40.13 90 top
LED5  Red  [LED-0603]  13.84,57.91 270 top
LED6  Green  [LED-0603]  16.51,57.91 90 top
LED7  Red  [LED-0603]  13.84,75.69 270 top
LED8  Green  [LED-0603]  16.51,75.69 90 top
LED9  Red  [LED-0603]  13.84,93.47 270 top
LED10  Green  [LED-0603]  16.51,93.47 90 top
LED11  Red  [LED-0603]  40.51,22.35 270 top
LED12  Green  [LED-0603]  43.18,22.35 90 top
LED13  Red  [LED-0603]  40.51,40.13 270 top
LED14  Green  [LED-0603]  43.18,40.13 90 top
LED15  Red  [LED-0603]  40.51,57.91 270 top
LED16  Green  [LED-0603]  43.18,57.91 90 top
LED17  Red  [LED-0603]  40.51,75.69 270 top
LED18  Green  [LED-0603]  43.18,75.69 90 top
LED19  Red  [LED-0603]  40.51,93.47 270 top
LED20  Green  [LED-0603]  43.18,93.47 90 top
LED21  Red  [LED-0603]  67.18,22.35 270 top
LED22  Green  [LED-0603]  69.85,22.35 90 top
LED23  Red  [LED-0603]  67.18,40.13 270 top
LED24  Green  [LED-0603]  69.85,40.13 90 top
LED25  Red  [LED-0603]  67.18,57.91 270 top